# Allegro board arena_12-12_v2C.brd
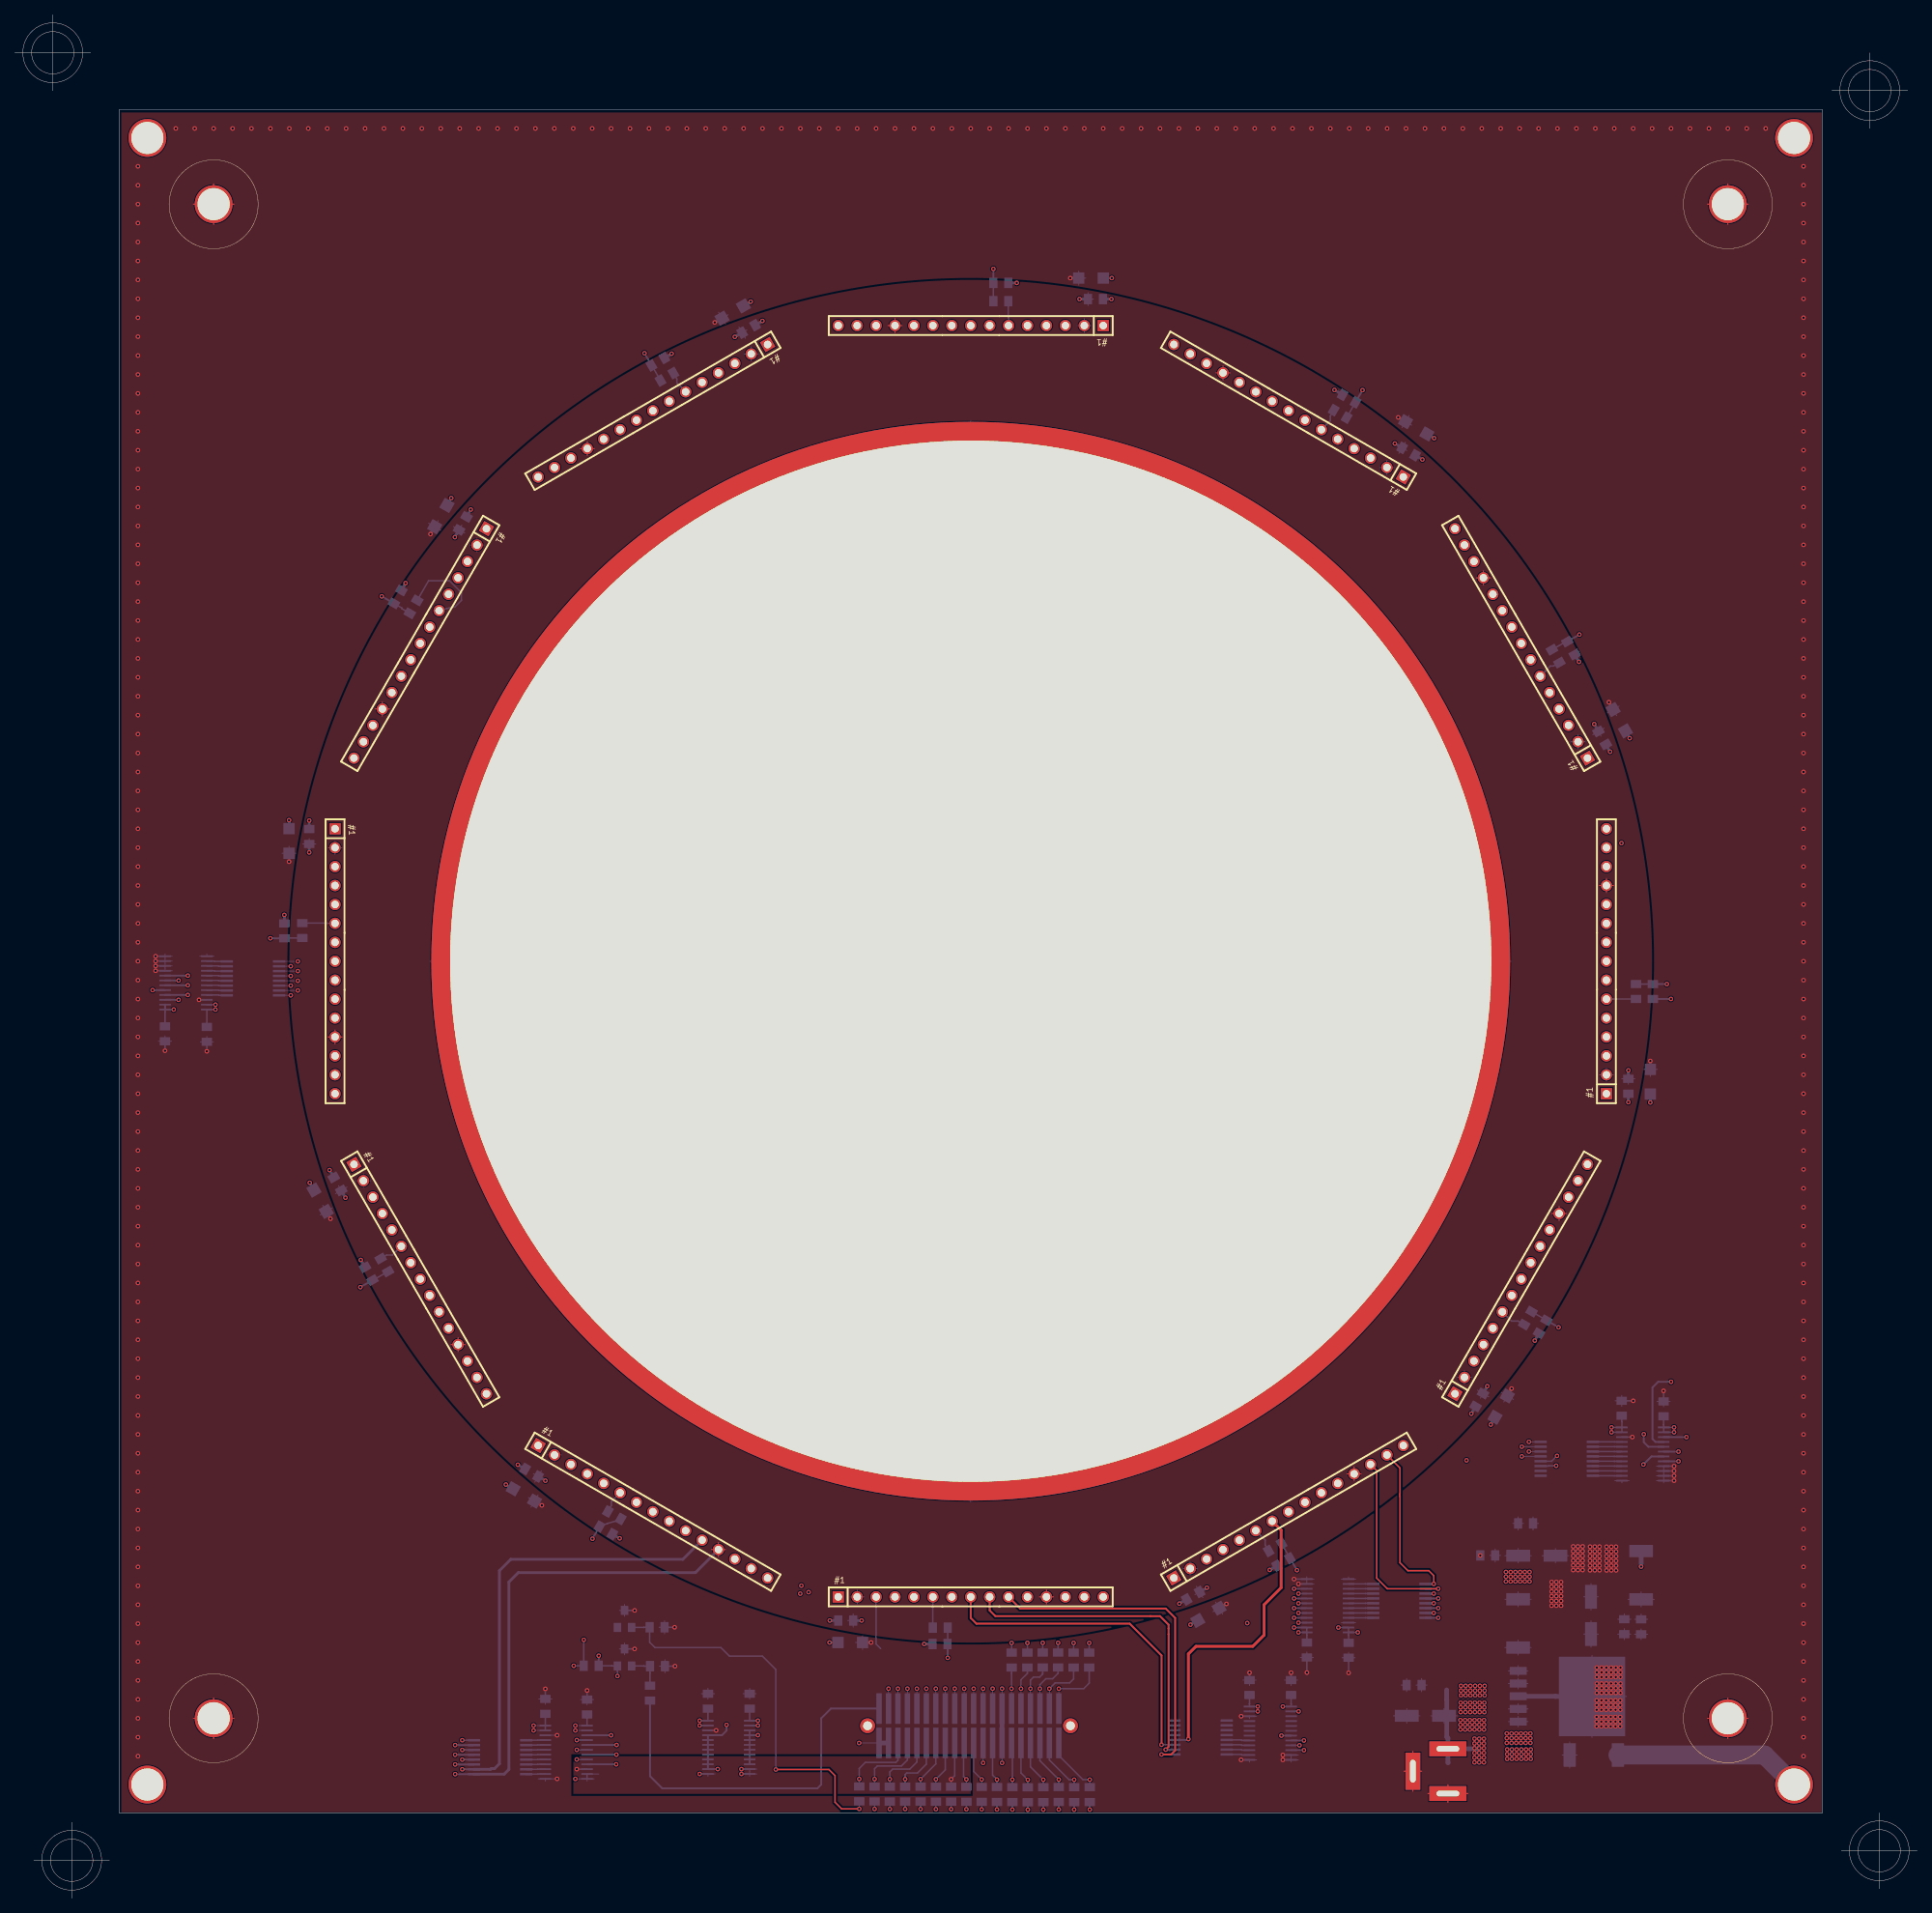
[diagram p0: board, top side]
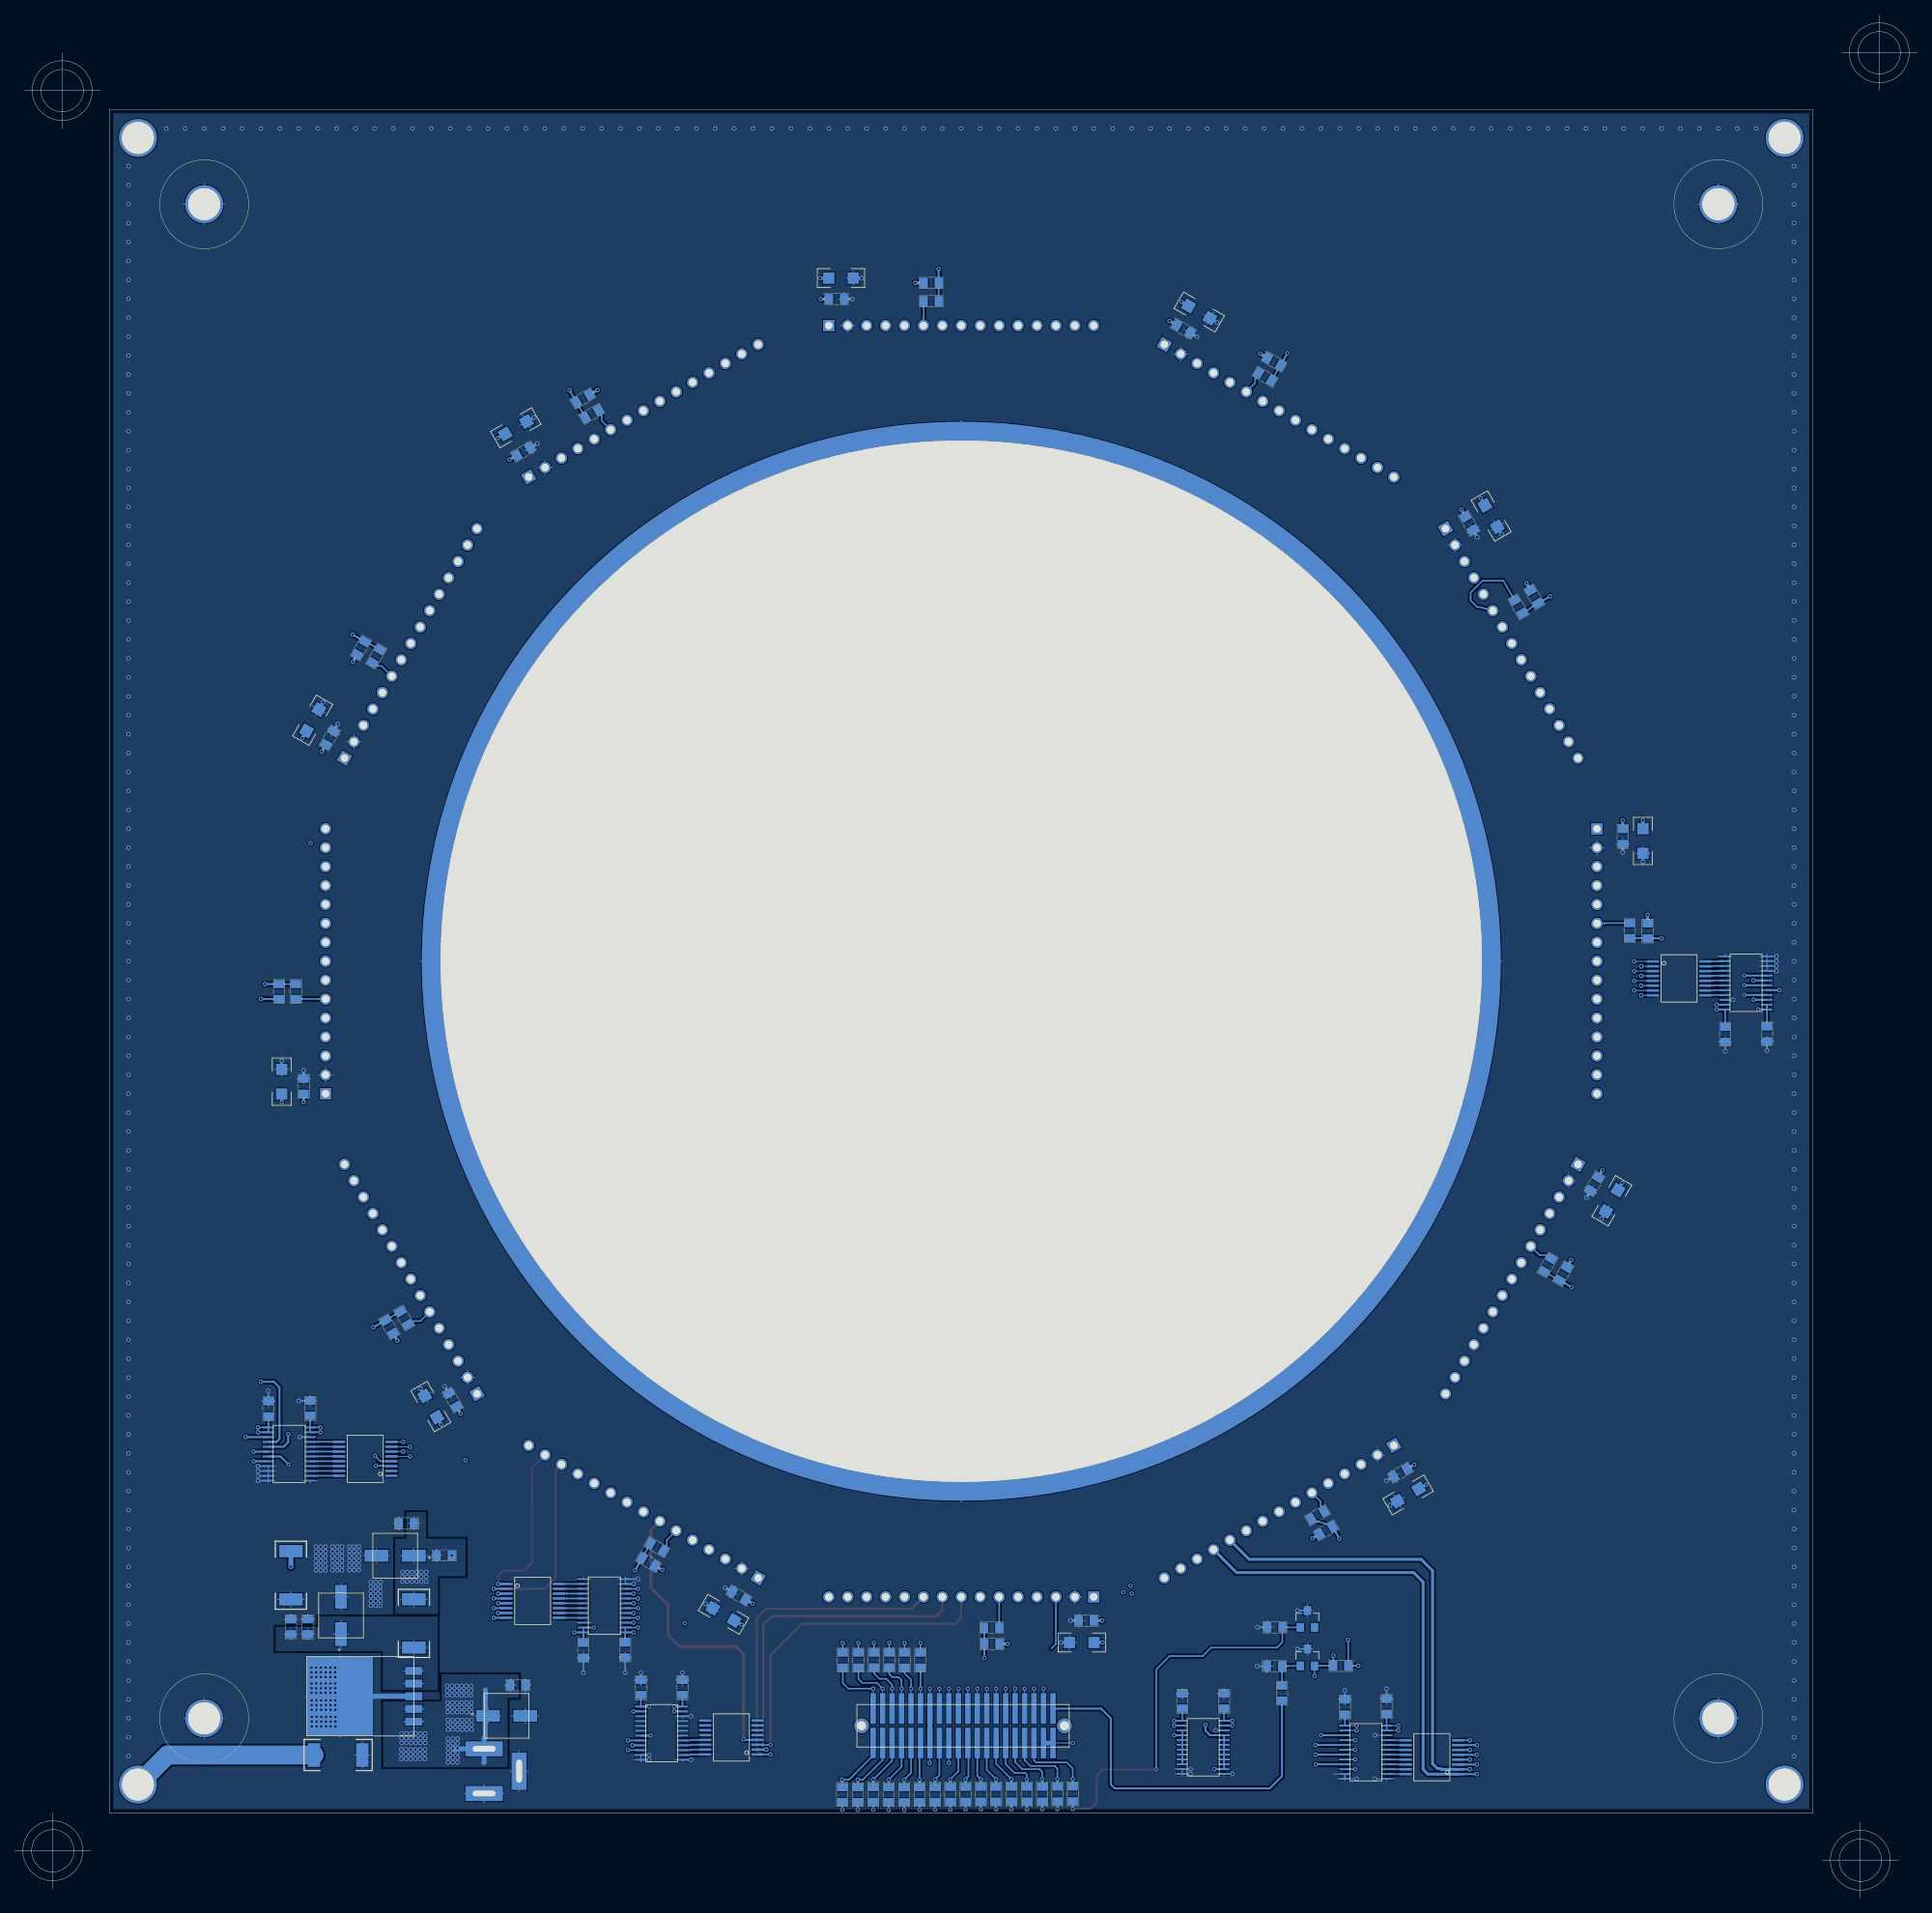
[diagram p1: board, bottom side, seen from below]

Outline 255.27 x 252.73 mm; copper layers: TOP, PWR, GND0, CLK, GND1, MOSI, GND2, SIG, GND3, MISO, GND4, BOTTOM. Coordinates in mm from the lower left corner of the outline.
Outline path: circle c5.08,247.65 r2.84 ; circle c5.08,247.65 r4.02 ; circle c7.62,5.08 r2.84 ; circle c7.62,5.08 r4.02 ; circle c26.67,227.31 r5.97 ; circle c26.67,24.13 r5.97 ; circle c128.27,125.73 r69.85 ; circle c229.87,227.31 r5.97 ; circle c229.87,24.13 r5.97 ; circle c248.92,242.57 r2.84 ; circle c248.92,242.57 r4.02 ; circle c250.19,6.35 r2.84 ; circle c250.19,6.35 r4.02 ; 0,247.65 10.16,247.65 ; 2.54,5.08 12.7,5.08 ; 5.08,252.73 5.08,242.57 ; 7.62,10.16 7.62,0 ; 125.98,125.73 130.56,125.73 ; 128.27,123.44 128.27,128.02 ; 243.84,242.57 254,242.57 ; 245.11,6.35 255.27,6.35 ; 248.92,247.65 248.92,237.49 ; 250.19,11.43 250.19,1.27 ; 13.97,240.03 13.97,11.43 242.57,11.43 242.57,240.03 13.97,240.03

## Design rules (mm)
net group MISO: nets MISO_0 MISO_1 MISO_2 MISO_3 MISO_4 MISO_5 MISO_6 MISO_7 MISO_8 MISO_9 MISO_10 MISO_11
net group MOSI: nets MOSI_0 MOSI_1 MOSI_2 MOSI_3 MOSI_4 MOSI_5 MOSI_6 MOSI_7 MOSI_8 MOSI_9 MOSI_10 MOSI_11
net group MOSI_IN: nets MOSI_IN_0 MOSI_IN_1 MOSI_IN_2 MOSI_IN_3 MOSI_IN_4 MOSI_IN_5 MOSI_IN_6 MOSI_IN_7 MOSI_IN_8 MOSI_IN_9 MOSI_IN_10 MOSI_IN_11

## Placement (name value [footprint] x y rotation side)
C1  10uF  [1206]  96.33 212.85 210 bottom
C2  10uF  [1206]  144.41 217.41 180 bottom
C3  0.1uF  [EIA0805]  187.03 194.13 150 bottom
C4  10uF  [1206]  188.05 197.32 150 bottom
C5  0.1uF  [EIA0805]  145.01 214.59 180 bottom
C6  0.1uF  [EIA0805]  98.46 210.59 210 bottom
C7  0.1uF  [0805]  60.11 184.49 240 bottom
C8  10uF  [1206]  57.16 185.47 240 bottom
C9  10uF  [1206]  219.47 109.56 90 bottom
C10  0.1uF  [EIA0805]  216.52 108.95 90 bottom
C11  10uF  [1206]  36.79 141.87 270 bottom
C12  0.1uF  [EIA0805]  39.5 142.47 270 bottom
C13  10uF  [1206]  199.45 65.96 60 bottom
C14  0.1uF  [EIA0805]  196.52 66.85 60 bottom
C15  10uF  [1206]  68.3 54.1 330 bottom
C16  0.1uF  [EIA0805]  69.34 57.09 330 bottom
C17  10uF  [1206]  160.17 38.09 30 bottom
C18  0.1uF  [EIA0805]  158.12 40.59 30 bottom
C19  0.1uF  [EIA0805]  111.49 37.25 0 bottom
C20  10uF  [1206]  112.1 34.3 0 bottom
C21  10uF  [1206]  40.96 93.59 300 bottom
C22  0.1uF  [EIA0805]  43.29 95.85 300 bottom
C23  10uF  [1206]  215.3 158.08 120 bottom
C24  0.1uF  [EIA0805]  213 155.7 120 bottom
C25  0.1uF  [EIA0805]  76.78 25.64 90 bottom
C26  0.1uF  [EIA0805]  165.68 28.26 90 bottom
C27  0.1uF  [EIA0805]  171.26 28.26 90 bottom
C28  0.1uF  [EIA0805]  71.18 25.73 90 bottom
C29  0.1uF  [EIA0805]  25.76 115.91 270 bottom
C30  0.1uF  [EIA0805]  20.14 115.99 270 bottom
C31  0.1uF  [EIA0805]  173.38 33.3 270 bottom
C32  0.1uF  [EIA0805]  178.98 33.26 270 bottom
C33  0.1uF  [EIA0805]  98.6 26.43 90 bottom
C34  0.1uF  [EIA0805]  93 26.43 90 bottom
C35  0.1uF  [EIA0805]  215.63 65.74 90 bottom
C36  0.1uF  [EIA0805]  221.25 65.66 90 bottom
C37  0.1uF  [EIA0805]  187.77 28.59 180 bottom
C38  10uF  [AL_CAP_D]  191.78 24.46 180 bottom
C39  10uF/6.3/Elec  [AL_CAP_D]  211.51 35.43 90 bottom
C40  0.001uF/X5R  [EIA0805]  218.24 36.41 90 bottom
C41  0.1uF/X5R  [EIA0805]  215.98 36.42 90 bottom
C42  2.2uF/60/Elec  [AL_CAP_D]  201.74 45.95 0 bottom
C43  0.01uF/X5R  [EIA0805]  197.65 45.99 180 bottom
C44  0.1uF/X5R  [EIA0805]  202.73 50.28 0 bottom
J1  CONN15  [HDR-1X15]  70.22 60.74 330 top
J2  CONN15  [HDR-1X15]  193.26 67.68 60 top
J3  CONN15  [HDR-1X15]  211.04 152.99 120 top
J4  CONN15  [HDR-1X15]  110.49 40.42 0 top
J5  CONN15  [HDR-1X15]  42.96 143.51 270 top
J6  CONN15  [HDR-1X15]  101.01 208.5 210 top
J7  CONN15  [HDR-1X15]  186.32 190.72 150 top
J8  CONN15  [HDR-1X15]  155.53 42.96 30 top
J9  CONN15  [HDR-1X15]  213.58 107.95 90 top
J10  CONN15  [HDR-1X15]  45.5 98.47 300 top
J17  CONN15  [HDR-1X15]  63.28 183.78 240 top
J19  CONN15  [HDR-1X15]  146.05 211.04 180 top
J25  A35051-ND (68pin, 1.27mm pitch, Through hold, A113405-ND)  [SMV_2X20]  115.96 25.44 270 bottom
J26  CP-102A-ND  [PJ102A]  192.3 17.03 0 bottom
L1  Ferrite Bead/5-15Ohm  [EIA2512]  211.89 19.2 0 bottom
L2  Ferrite Bead/5-15Ohm  [EIA2512]  218.24 43.33 270 bottom
L3  Ferrite Bead/5-15Ohm  [EIA2512]  201.73 36.87 90 bottom
M1  TEST POINT  [8-32]  238.76 15.24 0 top
M2  TEST POINT  [8-32]  17.78 15.24 0 top
M3  TEST POINT  [8-32]  229.87 24.13 0 top
M4  TEST POINT  [8-32]  26.67 24.13 0 top
M5  TEST POINT  [8-32]  229.87 227.33 0 top
M6  TEST POINT  [8-32]  26.67 227.33 0 top
M7  TEST POINT  [8-32]  17.78 236.22 0 top
M8  TEST POINT  [8-32]  238.76 236.22 0 top
M9  TEST POINT  [1-32]  128.27 125.73 0 top
NOREF  -  []  13.97 240.03 0 top
NOREF#2  -  []  149.56 192.26 0 top
NOREF#3  -  []  242.57 11.43 90 top
Q1  MTD4P06  [SOT-23]  81.81 37.47 180 bottom
Q3  MTD4P06  [SOT-23]  81.81 32.3 180 bottom
R1  27  [EIA0805]  124.18 36.3 180 bottom
R2  27  [EIA0805]  80.44 51.38 150 bottom
R3  27  [EIA0805]  49.58 84.96 120 bottom
R4  27  [EIA0805]  38.57 129.84 90 bottom
R5  27  [EIA0805]  53.49 173.29 60 bottom
R6  27  [EIA0805]  87.5 204.17 30 bottom
R7  27  [EIA0805]  132.31 214.31 0 bottom
R8  27  [EIA0805]  177.85 199.19 150 bottom
R9  27  [EIA0805]  206.77 166.67 300 bottom
R10  27  [EIA0805]  217.55 121.67 270 bottom
R11  27  [EIA0805]  203.03 77.84 240 bottom
R12  27  [EIA0805]  169.11 47.09 210 bottom
R13  200  [EIA0805]  113.31 13.98 270 bottom
R14  20K  [EIA0805]  86.18 36.35 180 bottom
R17  200  [EIA0805]  85.23 27.51 90 bottom
R18  20K  [EIA0805]  86.23 31.13 180 bottom
R19  4.7K  [EIA0805]  131.79 13.91 270 bottom
R20  4.7K  [EIA0805]  77.34 31.18 0 bottom
R21  4.7K  [EIA0805]  125.64 13.94 270 bottom
R22  4.7K  [EIA0805]  123.6 13.94 270 bottom
R23  4.7K  [EIA0805]  133.76 31.94 90 bottom
R24  4.7K  [EIA0805]  135.88 31.94 90 bottom
R25  4.7K  [EIA0805]  140.08 13.91 270 bottom
R26  4.7K  [EIA0805]  138.01 13.88 270 bottom
R27  4.7K  [EIA0805]  135.93 13.87 270 bottom
R28  4.7K  [EIA0805]  133.86 13.89 270 bottom
R29  4.7K  [EIA0805]  129.74 13.92 270 bottom
R30  4.7K  [EIA0805]  127.69 13.93 270 bottom
R31  4.7K  [EIA0805]  144.25 13.89 270 bottom
R32  4.7K  [EIA0805]  142.15 13.88 270 bottom
R33  4.7K  [EIA0805]  137.93 31.95 90 bottom
R34  4.7K  [EIA0805]  139.99 31.95 90 bottom
R35  4.7K  [EIA0805]  142.07 31.94 90 bottom
R36  4.7K  [EIA0805]  144.17 31.94 90 bottom
R37  4.7K  [EIA0805]  179.04 201.24 150 bottom
R38  4.7K  [EIA0805]  132.31 216.76 0 bottom
R39  4.7K  [EIA0805]  86.28 206.2 30 bottom
R40  4.7K  [EIA0805]  51.36 174.62 60 bottom
R41  4.7K  [EIA0805]  36.16 129.81 90 bottom
R42  4.7K  [EIA0805]  47.49 83.79 120 bottom
R43  4.7K  [EIA0805]  79.31 49.35 330 bottom
R44  4.7K  [EIA0805]  124.16 34.1 180 bottom
R49  4.7K  [EIA0805]  170.24 45.11 210 bottom
R50  4.7K  [EIA0805]  205.03 76.67 240 bottom
R51  4.7K  [EIA0805]  219.81 121.67 270 bottom
R52  4.7K  [EIA0805]  208.83 167.77 300 bottom
R57  4.7K  [EIA0805]  121.54 13.96 270 bottom
R58  4.7K  [EIA0805]  119.47 13.96 270 bottom
R59  4.7K  [EIA0805]  117.41 13.96 270 bottom
R60  4.7K  [EIA0805]  115.37 13.97 270 bottom
RN1  20  [SSOP16]  65.11 18.91 0 bottom
RN3  20  [SSOP16]  31.94 123.43 180 bottom
RN4  20  [SSOP16]  185.79 39.89 180 bottom
RN5  20  [SSOP16]  159.12 21.55 0 bottom
RN6  20  [SSOP16]  208.25 58.95 0 bottom
U1  SN74LVC8T245  [TSSOP24]  76.78 23.15 180 bottom
U2  SN74LVC8T245  [TSSOP24]  20.15 119.25 0 bottom
U3  SN74LVC8T245  [TSSOP24]  98.6 23.81 180 bottom
U4  SN74LVC8T245  [TSSOP24]  173.37 35.66 0 bottom
U5  SN74LVC8T245  [TSSOP24]  171.27 25.7 180 bottom
U6  SN74LVC8T245  [TSSOP24]  221.26 63.17 180 bottom
U7  LT1764  [DD5]  201.74 23.69 0 bottom

## Library data of the parts
C1 C2 C4 C8 C9 C11 C13 C15 C17 C20 C21 C23 C38 = CAPACITOR POL
C3 C5-C7 C10 C12 C14 C16 C18 C19 C22 C24-C37 = CAPACITOR NON-POL
C39 C42 = CAPACITOR
C40 C41 C43 C44 = CAP NP
J1-J10 J17 J19 = CONN RECT 15_7
J25 = HEADER 34x2_1
J26 = HEADER 3
L1-L3 = BEADARR_4
M1-M9 = TEST POINT
Q1 Q3 = MTD4P06
R1-R14 R17-R44 R49-R52 R57-R60 = RESISTOR
RN1 RN3-RN6 = RESNW_IS_8
U1-U6 = SN7474LVC8T245
U7 = LT1764

## Footprints (pads in the part's own frame, mm; a bottom-side part is the same pattern mirrored in y, then rotated)
1-32
  round 144.78 hole 139.7 unplated: (0,0)
8-32
  round 5.08 hole 4.305: 1(0,0)
0805
  rect 1.1x1.4 smd: 1(-1.001,0) 2(1.001,0)
1206
  rect 1.524x1.524 smd: 1(-1.651,0) 2(1.651,0)
AL_CAP_D
  rect 3.2x1.6 smd: 1(0,0) 2(5.001,0)
DD5
  rect 2.286x1.067 smd: 1(0,0) 2(0,-1.702) 3(0,-3.404) 4(0,-5.105) 5(0,-6.807)
  rect 8.89x10.668 smd: 6(9.906,-3.378)
EIA0805
  rect 1.1x1.4 smd: 1(-1.001,0) 2(1.001,0)
EIA2512
  rect 1.651x3.175 smd: 1(-3.239,0) 2(3.239,0)
HDR-1X15
  rect 1.524x1.524 hole 1.016: 1(0,0)
  round 1.524 hole 1.016: 2(2.54,0) 3(5.08,0) 4(7.62,0) 5(10.16,0) 6(12.7,0) 7(15.24,0) 8(17.78,0) 9(20.32,0) 10(22.86,0) 11(25.4,0) 12(27.94,0) 13(30.48,0) 14(33.02,0) 15(35.56,0)
PJ102A
  rect 5.001x1.999 hole 3.051x0.759: 1(0,-3) 2(0,3)
  rect 1.999x5.001 hole 0.759x3.051: 3(-4.699,0)
SMV_2X20
  round 1.999 hole 1.191 unplated: (2.309,-25.69) (2.309,1.539)
  rect 4.11x0.729 smd: 1(0,0) 2(0,-1.27) 3(0,-2.54) 4(0,-3.81) 5(0,-5.08) 6(0,-6.35) 7(0,-7.62) 8(0,-8.89) 9(0,-10.16) 10(0,-11.43) 11(0,-12.7) 12(0,-13.97) 13(0,-15.24) 14(0,-16.51) 15(0,-17.78) 16(0,-19.05) 17(0,-20.32) 18(0,-21.59) 19(0,-22.86) 20(0,-24.13) 21(4.62,-24.13) 22(4.62,-22.86) 23(4.62,-21.59) 24(4.62,-20.32) 25(4.62,-19.05) 26(4.62,-17.78) 27(4.62,-16.51) 28(4.62,-15.24) 29(4.62,-13.97) 30(4.62,-12.7) 31(4.62,-11.43) 32(4.62,-10.16) 33(4.62,-8.89) 34(4.62,-7.62) 35(4.62,-6.35) 36(4.62,-5.08) 37(4.62,-3.81) 38(4.62,-2.54) 39(4.62,-1.27) 40(4.62,0)
SOT-23
  rect 1.016x1.219 smd: 1(-0.953,-1.143) 2(0.953,-1.143) 3(0,1.143)
SSOP16
  rect 1.651x0.33 smd: 1(-3.505,2.276) 2(-3.505,1.626) 3(-3.505,0.975) 4(-3.505,0.325) 5(-3.505,-0.325) 6(-3.505,-0.975) 7(-3.505,-1.626) 8(-3.505,-2.276) 9(3.505,-2.276) 10(3.505,-1.626) 11(3.505,-0.975) 12(3.505,-0.325) 13(3.505,0.325) 14(3.505,0.975) 15(3.505,1.626) 16(3.505,2.276)
TSSOP24
  rect 1.549x0.249 smd: 1(0,0) 2(0,-0.65) 3(0,-1.3) 4(0,-1.951) 5(0,-2.601) 6(0,-3.251) 7(0,-3.899) 8(0,-4.549) 9(0,-5.199) 10(0,-5.85) 11(0,-6.5) 12(0,-7.15) 13(5.601,-7.15) 14(5.601,-6.5) 15(5.601,-5.85) 16(5.601,-5.199) 17(5.601,-4.549) 18(5.601,-3.899) 19(5.601,-3.251) 20(5.601,-2.601) 21(5.601,-1.951) 22(5.601,-1.3) 23(5.601,-0.65) 24(5.601,0)

## Nets
3.3VDC: C25.1 C27.1 C29.1 C31.1 C33.1 C35.1 C42.1 C43.1 C44.1 L3.2 R19.2 R21.2 R22.2 R23.2 R24.2 R25.2 R26.2 R27.2 R28.2 R29.2 R30.2 R31.2 R32.2 R33.2 R34.2 R35.2 R36.2 R57.2 R58.2 R59.2 R60.2 U1.1(VCCA) U1.2(DIR) U2.23(VCCB2) U2.24(VCCB1) U3.1(VCCA) U3.2(DIR) U4.1(VCCA) U4.2(DIR) U5.1(VCCA) U5.2(DIR) U6.23(VCCB2) U6.24(VCCB1)
5VDC: C1.1 C2.1 C3.1 C4.1 C5.1 C6.1 C7.1 C8.1 C9.1 C10.1 C11.1 C12.1 C13.1 C14.1 C15.1 C16.1 C17.1 C18.1 C19.1 C20.1 C21.1 C22.1 C23.1 C24.1 C26.1 C28.1 C30.1 C32.1 C34.1 C36.1 C37.1 C38.1 J1.1 J2.1 J3.1 J4.1 J5.1 J6.1 J7.1 J8.1 J9.1 J10.1 J17.1 J19.1 J26.1 R20.1 R37.2 R38.2 R39.2 R40.2 R41.2 R42.2 R43.2 R44.2 R49.2 R50.2 R51.2 R52.2 U1.23(VCCB2) U1.24(VCCB1) U2.1(VCCA) U2.2(DIR) U3.23(VCCB2) U3.24(VCCB1) U4.23(VCCB2) U4.24(VCCB1) U5.23(VCCB2) U5.24(VCCB1) U6.1(VCCA) U6.2(DIR) U7.1(IN) U7.2(EN)
GND: C1.2 C2.2 C3.2 C4.2 C5.2 C6.2 C7.2 C8.2 C9.2 C10.2 C11.2 C12.2 C13.2 C14.2 C15.2 C16.2 C17.2 C18.2 C19.2 C20.2 C21.2 C22.2 C23.2 C24.2 C25.2 C26.2 C27.2 C28.2 C29.2 C30.2 C31.2 C32.2 C33.2 C34.2 C35.2 C36.2 C37.2 C38.2 C39.2 C40.2 C41.2 C42.2 C43.2 C44.2 J1.2 J2.2 J3.2 J4.2 J5.2 J6.2 J7.2 J8.2 J9.2 J10.2 J17.2 J19.2 J26.2 J26.3 L1.1 L2.2 M3.1 M4.1 M5.1 M6.1 Q1.3(S) Q3.3(S) R14.1 R18.1 U1.11(GND1) U1.12(GND2) U1.13(GND3) U1.22(\\O\E\) U2.9(A7) U2.10(A8) U2.11(GND1) U2.12(GND2) U2.13(GND3) U2.22(\\O\E\) U3.11(GND1) U3.12(GND2) U3.13(GND3) U3.22(\\O\E\) U4.11(GND1) U4.12(GND2) U4.13(GND3) U4.22(\\O\E\) U5.11(GND1) U5.12(GND2) U5.13(GND3) U5.22(\\O\E\) U6.9(A7) U6.10(A8) U6.11(GND1) U6.12(GND2) U6.13(GND3) U6.22(\\O\E\) U7.3(GND) U7.6(PAD)
GND_SIGNAL: J25.14 J25.27 J25.29 J25.39 J25.40 L2.1
CS0: J1.7 J2.7 J3.7 J4.7 J5.7 J6.7 J7.7 J8.7 J9.7 J10.7 J17.7 J19.7 RN5.4
CS1: J1.8 J2.8 J3.8 J4.8 J5.8 J6.8 J7.8 J8.8 J9.8 J10.8 J17.8 J19.8 RN5.3
CS2: J1.9 J2.9 J3.9 J4.9 J5.9 J6.9 J7.9 J8.9 J9.9 J10.9 J17.9 J19.9 RN5.2
CS3: J1.10 J2.10 J3.10 J4.10 J5.10 J6.10 J7.10 J8.10 J9.10 J10.10 J17.10 J19.10 RN5.1
CS4: J1.11 J2.11 J3.11 J4.11 J5.11 J6.11 J7.11 J8.11 J9.11 J10.11 J17.11 J19.11 RN1.2
CS5: J1.12 J2.12 J3.12 J4.12 J5.12 J6.12 J7.12 J8.12 J9.12 J10.12 J17.12 J19.12 RN1.1
CS6: J1.13 J2.13 J3.13 J4.13 J5.13 J6.13 J7.13 J8.13 J9.13 J10.13 J17.13 J19.13 RN4.2
CS7: J1.14 J2.14 J3.14 J4.14 J5.14 J6.14 J7.14 J8.14 J9.14 J10.14 J17.14 J19.14 RN4.1
CS_IN_0: J25.37 R60.1 U5.7(A5)
CS_IN_1: J25.36 R59.1 U5.8(A6)
CS_IN_2: J25.35 R58.1 U5.9(A7)
CS_IN_3: J25.34 R57.1 U5.10(A8)
CS_IN_4: J25.33 R22.1 U1.9(A7)
CS_IN_5: J25.32 R21.1 U1.10(A8)
CS_IN_6: J25.31 R30.1 U4.9(A7)
CS_IN_7: J25.30 R29.1 U4.10(A8)
EXT_INT: J1.15 J2.15 J3.15 J4.15 J5.15 J6.15 J7.15 J8.15 J9.15 J10.15 J17.15 J19.15 Q3.2(D) R20.2
EXT_INT_IN: J25.1 R17.1
MISO_0: R1.1 R44.1 U6.7(A5)
MISO_1: R2.1 R43.1 U2.3(A1)
MISO_2: R3.1 R42.1 U2.4(A2)
MISO_3: R4.1 R41.1 U2.5(A3)
MISO_4: R5.1 R40.1 U2.6(A4)
MISO_5: R6.1 R39.1 U2.7(A5)
MISO_6: R7.1 R38.1 U2.8(A6)
MISO_7: R8.1 R37.1 U6.8(A6)
MISO_8: R9.1 R52.1 U6.3(A1)
MISO_9: R10.1 R51.1 U6.4(A2)
MISO_10: R11.1 R50.1 U6.5(A3)
MISO_11: R12.1 R49.1 U6.6(A4)
MISO_OUT_0: J25.13 RN6.4
MISO_OUT_1: J25.12 RN3.8
MISO_OUT_2: J25.11 RN3.7
MISO_OUT_3: J25.10 RN3.6
MISO_OUT_4: J25.9 RN3.5
MISO_OUT_5: J25.8 RN3.4
MISO_OUT_6: J25.7 RN3.3
MISO_OUT_7: J25.6 RN6.3
MISO_OUT_8: J25.5 RN6.8
MISO_OUT_9: J25.4 RN6.7
MISO_OUT_10: J25.3 RN6.6
MISO_OUT_11: J25.2 RN6.5
MOSI_0: J4.5 RN1.8
MOSI_1: J1.5 RN1.7
MOSI_2: J10.5 RN1.6
MOSI_3: J5.5 RN1.5
MOSI_4: J17.5 RN1.4
MOSI_5: J6.5 RN1.3
MOSI_6: J19.5 RN4.8
MOSI_7: J7.5 RN4.7
MOSI_8: J3.5 RN4.6
MOSI_9: J9.5 RN4.5
MOSI_10: J2.5 RN4.4
MOSI_11: J8.5 RN4.3
MOSI_IN_0: J25.26 R28.1 U1.8(A6)
MOSI_IN_1: J25.25 R27.1 U1.7(A5)
MOSI_IN_2: J25.24 R26.1 U1.6(A4)
MOSI_IN_3: J25.23 R25.1 U1.5(A3)
MOSI_IN_4: J25.22 R32.1 U1.4(A2)
MOSI_IN_5: J25.21 R31.1 U1.3(A1)
MOSI_IN_6: J25.20 R36.1 U4.3(A1)
MOSI_IN_7: J25.19 R35.1 U4.4(A2)
MOSI_IN_8: J25.18 R34.1 U4.5(A3)
MOSI_IN_9: J25.17 R33.1 U4.6(A4)
MOSI_IN_10: J25.16 R24.1 U4.7(A5)
MOSI_IN_11: J25.15 R23.1 U4.8(A6)
RESET_IN: J25.38 R13.1
SCK: J1.4 J2.4 J3.4 J4.4 J5.4 J6.4 J7.4 J8.4 J9.4 J10.4 J17.4 J19.4 U3.14(B8) U3.15(B7) U3.16(B6) U3.17(B5) U3.18(B4) U3.19(B3) U3.20(B2) U3.21(B1)
SCK_IN_0: J25.28 R19.1 U3.3(A1) U3.4(A2) U3.5(A3) U3.6(A4) U3.7(A5) U3.8(A6) U3.9(A7) U3.10(A8)
N00182: J4.6 R1.2
N04213: J1.6 R2.2
N04860: J10.6 R3.2
N05048: J5.6 R4.2
N06135: J17.6 R5.2
N06323: J6.6 R6.2
N06511: J19.6 R7.2
N06699: J7.6 R8.2
N07866: J3.6 R9.2
N08054: J9.6 R10.2
N08430: J8.6 R12.2
N65117: J2.6 R11.2
N65750: Q1.1(G) R13.2 R14.2
N124786: C39.1 C40.1 C41.1 L3.1 U7.4(OUT) U7.5(SENSE)
N207682: Q3.1(G) R17.2 R18.2
N248336: L1.2 M1.1 M2.1 M7.1 M8.1
N271524: RN5.14 U5.16(B6)
N271526: RN5.15 U5.15(B7)
N271528: RN5.16 U5.14(B8)
N279010: RN5.13 U5.17(B5)
N926808: RN3.9 U2.21(B1)
N926809: RN3.10 U2.20(B2)
N953908: RN1.9 U1.21(B1)
N953909: RN1.10 U1.20(B2)
N9268010: RN3.11 U2.19(B3)
N9268011: RN3.12 U2.18(B4)
N9268012: RN3.13 U2.17(B5)
N9268013: RN3.14 U2.16(B6)
N9268014: RN3.15 U2.15(B7)
N9268015: RN3.16 U2.14(B8)
N9539010: RN1.11 U1.19(B3)
N9539011: RN1.12 U1.18(B4)
N9539012: RN1.13 U1.17(B5)
N9539013: RN1.14 U1.16(B6)
N9539014: RN1.15 U1.15(B7)
N9539015: RN1.16 U1.14(B8)
N10228215: RN4.9 U4.21(B1)
N10228216: RN4.10 U4.20(B2)
N10228217: RN4.11 U4.19(B3)
N10228218: RN4.12 U4.18(B4)
N10228219: RN4.13 U4.17(B5)
N10228220: RN4.14 U4.16(B6)
N10228221: RN4.15 U4.15(B7)
N10228222: RN4.16 U4.14(B8)
N11250315: RN6.9 U6.21(B1)
N11250316: RN6.10 U6.20(B2)
N11250317: RN6.11 U6.19(B3)
N11250318: RN6.12 U6.18(B4)
N11250319: RN6.13 U6.17(B5)
N11250320: RN6.14 U6.16(B6)
N11250321: RN6.15 U6.15(B7)
N11250322: RN6.16 U6.14(B8)

Pads without a net: J1 3; J2 3; J3 3; J4 3; J5 3; J6 3; J7 3; J8 3; J9 3; J10 3; J17 3; J19 3; Q1 2; RN3 1 2; RN5 5 6 7 8 9 10 11 12; RN6 1 2; U5 3 4 5 6 18 19 20 21

## Via types
v1: diameter 0.61, hole 0.33, TOP to BOTTOM, 799 vias

## Routing (per net, layer and track width the routed paths; a pad name or vN(x,y) marks a point on that pad's centre or on a via; arc(x,y) is an arc through that point)
3.3VDC: length 67.1
  BOTTOM w0.127: 199.96,40.11 L3.2 ; L3.2 201.73,39.1 ; L3.2 203.49,40.11 ; L3.2 201.73,41.11 ; 201,50.28 C44.1 ; C44.1 202.46,50.28 ; C44.1 201.73,49.4 ; C44.1 201.73,51.16 ; 201.74,44.97 C42.1 ; C42.1 201.74,46.93 ; C42.1 203.52,45.95 ; C42.1 199.96,45.95 ; U1.1 v1(75.21,23.15) ; C43.1 199.38,45.99 ; C43.1 198.65,45.11 ; C43.1 198.65,46.87 ; C43.1 197.92,45.99 ; U1.2 v1(75.21,22.5)
  BOTTOM w0.203: U6.24 v1(214.26,63.17) ; U6.24 U6.23 v1(214.26,62.52) ; U6.24 215.66,63.93 215.63,63.95 C35.1 ; U4.1 U4.2 v1(171.66,36.31) ; U4.1 v1(172.25,35.66) ; U4.1 173.37,35.31 173.38,35.3 C31.1 ; R23.2 v1(133.76,34.24) ; R29.2 v1(129.74,11.91) ; C27.1 171.26,26.07 171.27,26.06 U5.1 v1(170.15,25.7) ; C33.1 U3.1 v1(99.71,23.81) ; R21.2 v1(125.64,11.94) ; v1(26.91,119.25) U2.24 C29.1 ; U3.2 v1(99.71,23.16) ; R31.2 v1(144.25,11.89) ; R25.2 v1(140.08,11.9) ; U2.23 v1(26.91,119.9) ; R60.2 v1(115.37,11.96) ; R26.2 v1(138.01,11.87) ; U1.1 C25.1 ; U5.2 v1(172.27,25.05) ; R57.2 v1(121.54,11.95) ; R19.2 v1(131.79,11.9) ; R36.2 v1(144.17,34.24) ; R24.2 v1(135.88,34.24) ; R33.2 v1(137.93,34.25) ; R28.2 v1(133.86,11.89) ; R58.2 v1(119.47,11.95) ; R34.2 v1(139.99,34.25) ; R59.2 v1(117.41,11.95) ; R27.2 v1(135.93,11.86) ; R35.2 v1(142.07,34.24) ; R32.2 v1(142.15,11.87) ; R22.2 v1(123.6,11.94) ; R30.2 v1(127.69,11.93)
  vias: v1(200.09,43.76) v1(200.09,43.13) v1(200.09,42.49) v1(200.72,43.76) v1(200.72,43.13) v1(200.72,42.49) v1(201.36,43.76) v1(201.36,43.13) v1(201.36,42.49) v1(201.99,43.76) v1(201.99,43.13) v1(201.99,42.49) v1(202.63,43.76) v1(202.63,43.13) v1(202.63,42.49) v1(203.26,43.76) v1(203.26,43.13) v1(203.26,42.49)
5VDC: length 157.7
  PWR w0.127: 210.1,152.99 J3.1 ; J3.1 211.98,152.99 ; J3.1 211.04,153.93 ; J3.1 211.04,152.04 ; J10.1 46.44,98.47 ; J10.1 44.56,98.47 ; J10.1 45.5,99.42 ; J10.1 45.5,97.53 ; J1.1 70.22,61.68 ; J1.1 71.16,60.74 ; J1.1 69.28,60.74 ; J1.1 70.22,59.8 ; 110.49,39.48 J4.1 ; J4.1 109.55,40.42 ; J4.1 111.43,40.42 ; J4.1 110.49,41.36 ; 186.32,189.78 J7.1 ; J7.1 186.32,191.66 ; J7.1 187.26,190.72 ; J7.1 185.38,190.72 ; 189.62,20.03 J26.1 ; J26.1 194.99,20.03 ; J26.1 192.3,18.85 ; J26.1 192.3,21.21 ; J2.1 194.2,67.68 ; J2.1 193.26,68.62 ; J2.1 193.26,66.74 ; J2.1 192.32,67.68 ; J17.1 64.22,183.78 ; J17.1 63.28,182.84 ; J17.1 62.34,183.78 ; J17.1 63.28,184.72 ; J8.1 156.47,42.96 ; J8.1 154.58,42.96 ; J8.1 155.53,42.02 ; J8.1 155.53,43.9 ; J6.1 101.01,209.44 ; J6.1 100.07,208.5 ; J6.1 101.96,208.5 ; J6.1 101.01,207.56 ; 146.05,210.1 J19.1 ; J19.1 146.99,211.04 ; J19.1 145.11,211.04 ; J19.1 146.05,211.98 ; J9.1 214.52,107.95 ; J9.1 213.58,107.01 ; J9.1 212.64,107.95 ; J9.1 213.58,108.89 ; J5.1 43.9,143.51 ; J5.1 42.96,144.45 ; J5.1 42.96,142.57 ; J5.1 42.02,143.51
  BOTTOM w0.127: 191.78,23.48 C38.1 ; C38.1 191.78,25.44 ; C38.1 193.56,24.46 ; C38.1 190,24.46 ; U1.23 v1(69.61,22.5) ; 200.42,25.39 U7.2 ; U7.2 201.74,24.67 ; U7.2 201.74,26.1 ; U7.2 203.06,25.39 ; C37.1 188.77,29.47 ; C37.1 188.04,28.59 ; C37.1 189.5,28.59 ; C37.1 188.77,27.71 ; 201.74,22.97 U7.1 ; U7.1 200.42,23.69 ; U7.1 201.74,24.4 ; U7.1 203.06,23.69 ; U1.24 v1(69.61,23.15)
  BOTTOM w0.203: U1.23 U1.24 C28.1 ; v1(21.31,119.25) U2.1 20.15,118.9 20.14,118.89 C30.1 ; U6.1 v1(222.66,63.17) ; U6.1 221.26,63.52 221.25,63.54 C36.1 ; U6.1 U6.2 v1(222.66,62.52) ; v1(177.61,36.31) U4.23 U4.24 ; C32.1 178.98,35.3 178.97,35.31 U4.24 ; v1(74.99,31.18) R20.1 v1(76.34,34.66) ; U3.23 v1(91.9,23.16) ; U4.24 v1(180.21,35.66) ; 178.06,201.82 178.14,201.74 R37.2 ; U5.23 v1(166.79,25.05) ; C34.1 U3.24 v1(91.9,23.81) ; v1(166.79,25.7) U5.24 165.67,26.06 165.68,26.07 C26.1
  BOTTOM w0.254: R51.2 v1(222.23,120.67) ; U2.1 U2.2
  BOTTOM w0.381: C22.1 v1(42.23,97.7) ; C10.1 v1(216.52,106.82) ; C6.1 v1(100.31,211.66) ; C15.1 v1(65.89,55.5) ; 46.98,84.66 v1(46.42,85.64) ; R44.2 v1(122.02,34.1) ; C14.1 v1(195.45,65) ; C19.1 v1(109.36,37.25) ; 178.06,201.82 v1(177.08,202.39) ; C13.1 v1(198.06,63.55) ; C9.1 v1(219.47,106.78) ; C5.1 v1(147.14,214.59) ; R38.2 v1(134.44,216.76) ; C3.1 v1(188.88,193.06) ; 216.13,156.65 v1(216.7,155.66) ; C12.1 v1(39.5,144.6) ; C4.1 v1(190.46,195.93) ; C18.1 v1(156.27,39.52) ; R40.2 v1(52.43,176.47) ; C2.1 v1(147.2,217.41) ; R43.2 v1(81.16,48.28) ; C1.1 v1(98.74,214.24) ; C16.1 v1(67.49,58.16) ; C7.1 v1(61.18,186.34) ; C21.1 v1(39.57,96) ; R41.2 v1(36.16,131.94) ; R39.2 v1(88.13,207.26) ; R52.2 v1(209.89,165.92) ; C24.1 v1(214.07,153.85) ; C8.1 v1(58.56,187.88) ; C20.1 v1(109.32,34.3) ; C11.1 v1(36.79,144.66) ; 169.38,44.61 v1(168.39,44.04) ; R50.2 v1(203.96,74.82) ; C17.1 v1(157.76,36.7)
  BOTTOM w0.635: J26.1 192.3,18.2 192.34,18.16 ; J26.1 196.36,20.03 196.43,20.1 ; J26.1 192.3,21.48 192.15,21.63 192.15,26.61 192.14,26.62 192.14,27.94
  vias: v1(105.39,40.86) v1(105.54,41.93) v1(106.51,41.06) v1(165.38,36.91) v1(194.02,26.23) v1(194.02,25.59) v1(194.02,24.96) v1(193.98,23.89) v1(193.98,23.25) v1(193.98,22.62) v1(194.06,28.49) v1(194.06,27.85) v1(194.06,27.22) v1(194.61,23.89) v1(194.61,23.25) v1(194.61,22.62) v1(194.69,28.49) v1(194.69,27.85) v1(194.69,27.22) v1(194.65,26.23) v1(194.65,25.59) v1(194.65,24.96) v1(194.81,58.75) v1(195.29,26.23) v1(195.29,25.59) v1(195.29,24.96) v1(195.25,23.89) v1(195.25,23.25) v1(195.25,22.62) v1(195.33,28.49) v1(195.33,27.85) v1(195.33,27.22) v1(195.88,23.89) v1(195.88,23.25) v1(195.88,22.62) v1(195.87,21.39) v1(195.87,20.75) v1(195.87,20.12) v1(195.87,19.48) v1(195.87,18.85) v1(195.87,18.21) v1(195.96,28.49) v1(195.96,27.85) v1(195.96,27.22) v1(195.92,26.23) v1(195.92,25.59) v1(195.92,24.96) v1(196.52,23.89) v1(196.52,23.25) v1(196.52,22.62) v1(196.51,21.39) v1(196.51,20.75) v1(196.51,20.12) v1(196.51,19.48) v1(196.51,18.85) v1(196.51,18.21) v1(196.6,28.49) v1(196.6,27.85) v1(196.6,27.22) v1(196.56,26.23) v1(196.56,25.59) v1(196.56,24.96) v1(197.19,26.23) v1(197.19,25.59) v1(197.19,24.96) v1(197.15,23.89) v1(197.15,23.25) v1(197.15,22.62) v1(197.14,21.39) v1(197.14,20.75) v1(197.14,20.12) v1(197.14,19.48) v1(197.14,18.85) v1(197.14,18.21) v1(197.23,28.49) v1(197.23,27.85) v1(197.23,27.22) v1(200.2,22.1) v1(200.2,21.46) v1(200.2,20.83) v1(200.25,19.95) v1(200.25,19.32) v1(200.25,18.68) v1(200.84,22.1) v1(200.84,21.46) v1(200.84,20.83) v1(200.89,19.95) v1(200.89,19.32) v1(200.89,18.68) v1(201.47,22.1) v1(201.47,21.46) v1(201.47,20.83) v1(201.52,19.95) v1(201.52,19.32) v1(201.52,18.68) v1(202.11,22.1) v1(202.11,21.46) v1(202.11,20.83) v1(202.16,19.95) v1(202.16,19.32) v1(202.16,18.68) v1(202.74,22.1) v1(202.74,21.46) v1(202.74,20.83) v1(202.79,19.95) v1(202.79,19.32) v1(202.79,18.68) v1(203.38,22.1) v1(203.38,21.46) v1(203.38,20.83) v1(203.43,19.95) v1(203.43,19.32) v1(203.43,18.68)
GND: length 1161.3
  TOP w0.127: J26.3 187.6,19.71 ; J26.3 188.79,17.03 ; J26.3 187.6,14.35 ; J26.3 186.42,17.03 ; M5.1 232.59,227.33 ; M5.1 227.15,227.33 ; M5.1 229.87,230.05 ; M5.1 229.87,224.61 ; 26.67,224.61 M6.1 ; M6.1 29.39,227.33 ; M6.1 23.95,227.33 ; M6.1 26.67,230.05 ; M3.1 232.59,24.13 ; M3.1 227.15,24.13 ; M3.1 229.87,21.41 ; M3.1 229.87,26.85 ; J26.2 192.3,15.21 ; J26.2 189.62,14.03 ; J26.2 194.99,14.03 ; J26.2 192.3,12.85 ; 26.67,21.41 M4.1 ; M4.1 23.95,24.13 ; M4.1 26.67,26.85 ; M4.1 29.39,24.13
  GND0 w0.127: 187.6,14.35 J26.3 ; J26.3 187.6,19.71 ; J26.3 186.42,17.03 ; J26.3 188.79,17.03 ; 26.67,224.61 M6.1 ; M6.1 26.67,230.05 ; M6.1 29.39,227.33 ; M6.1 23.95,227.33 ; M4.1 26.67,26.85 ; M4.1 26.67,21.41 ; M4.1 23.95,24.13 ; M4.1 29.39,24.13 ; J26.2 192.3,15.21 ; J26.2 192.3,12.85 ; J26.2 194.99,14.03 ; J26.2 189.62,14.03 ; M5.1 232.59,227.33 ; M5.1 229.87,224.61 ; M5.1 227.15,227.33 ; M5.1 229.87,230.05 ; 229.87,21.41 M3.1 ; M3.1 229.87,26.85 ; M3.1 232.59,24.13 ; M3.1 227.15,24.13
  GND1 w0.127: J26.2 192.3,15.21 ; J26.2 192.3,12.85 ; J26.2 189.62,14.03 ; J26.2 194.99,14.03 ; 186.42,17.03 J26.3 ; J26.3 187.6,14.35 ; J26.3 188.79,17.03 ; J26.3 187.6,19.71 ; M3.1 232.59,24.13 ; M3.1 229.87,26.85 ; M3.1 227.15,24.13 ; M3.1 229.87,21.41 ; 26.67,21.41 M4.1 ; M4.1 26.67,26.85 ; M4.1 23.95,24.13 ; M4.1 29.39,24.13 ; M6.1 29.39,227.33 ; M6.1 26.67,224.61 ; M6.1 23.95,227.33 ; M6.1 26.67,230.05 ; 227.15,227.33 M5.1 ; M5.1 229.87,224.61 ; M5.1 229.87,230.05 ; M5.1 232.59,227.33
  MOSI w0.127: J26.2 194.99,14.03 ; J26.2 192.3,15.21 ; J26.2 189.62,14.03 ; J26.2 192.3,12.85 ; 187.6,14.35 J26.3 ; J26.3 186.42,17.03 ; J26.3 187.6,19.71 ; J26.3 188.79,17.03 ; 229.87,21.41 M3.1 ; M3.1 229.87,26.85 ; M3.1 232.59,24.13 ; M3.1 227.15,24.13 ; M5.1 232.59,227.33 ; M5.1 227.15,227.33 ; M5.1 229.87,230.05 ; M5.1 229.87,224.61 ; M6.1 29.39,227.33 ; M6.1 23.95,227.33 ; M6.1 26.67,230.05 ; M6.1 26.67,224.61 ; M4.1 26.67,26.85 ; M4.1 26.67,21.41 ; M4.1 23.95,24.13 ; M4.1 29.39,24.13
  GND2 w0.127: J26.2 192.3,15.21 ; J26.2 192.3,12.85 ; J26.2 194.99,14.03 ; J26.2 189.62,14.03 ; M5.1 232.59,227.33 ; M5.1 229.87,230.05 ; M5.1 227.15,227.33 ; M5.1 229.87,224.61 ; M3.1 229.87,26.85 ; M3.1 227.15,24.13 ; M3.1 229.87,21.41 ; M3.1 232.59,24.13 ; M4.1 26.67,26.85 ; M4.1 23.95,24.13 ; M4.1 29.39,24.13 ; M4.1 26.67,21.41 ; 26.67,224.61 M6.1 ; M6.1 23.95,227.33 ; M6.1 29.39,227.33 ; M6.1 26.67,230.05 ; 186.42,17.03 J26.3 ; J26.3 187.6,19.71 ; J26.3 187.6,14.35 ; J26.3 188.79,17.03
  SIG w0.127: 189.62,14.03 J26.2 ; J26.2 192.3,15.21 ; J26.2 194.99,14.03 ; J26.2 192.3,12.85 ; 23.95,24.13 M4.1 ; M4.1 26.67,26.85 ; M4.1 29.39,24.13 ; M4.1 26.67,21.41 ; M5.1 232.59,227.33 ; M5.1 229.87,224.61 ; M5.1 229.87,230.05 ; M5.1 227.15,227.33 ; 227.15,24.13 M3.1 ; M3.1 229.87,26.85 ; M3.1 232.59,24.13 ; M3.1 229.87,21.41 ; J26.3 188.79,17.03 ; J26.3 187.6,19.71 ; J26.3 187.6,14.35 ; J26.3 186.42,17.03 ; M6.1 26.67,230.05 ; M6.1 29.39,227.33 ; M6.1 26.67,224.61 ; M6.1 23.95,227.33
  MISO w0.127: 192.3,12.85 J26.2 ; J26.2 192.3,15.21 ; J26.2 189.62,14.03 ; J26.2 194.99,14.03 ; 229.87,21.41 M3.1 ; M3.1 232.59,24.13 ; M3.1 229.87,26.85 ; M3.1 227.15,24.13 ; M6.1 29.39,227.33 ; M6.1 26.67,230.05 ; M6.1 23.95,227.33 ; M6.1 26.67,224.61 ; 227.15,227.33 M5.1 ; M5.1 232.59,227.33 ; M5.1 229.87,224.61 ; M5.1 229.87,230.05 ; 26.67,21.41 M4.1 ; M4.1 23.95,24.13 ; M4.1 26.67,26.85 ; M4.1 29.39,24.13 ; 187.6,14.35 J26.3 ; J26.3 186.42,17.03 ; J26.3 188.79,17.03 ; J26.3 187.6,19.71
  GND4 w0.127: M4.1 29.39,24.13 ; M4.1 23.95,24.13 ; M4.1 26.67,26.85 ; M4.1 26.67,21.41 ; 229.87,21.41 M3.1 ; M3.1 232.59,24.13 ; M3.1 227.15,24.13 ; M3.1 229.87,26.85 ; 23.95,227.33 M6.1 ; M6.1 29.39,227.33 ; M6.1 26.67,224.61 ; M6.1 26.67,230.05 ; 227.15,227.33 M5.1 ; M5.1 229.87,224.61 ; M5.1 229.87,230.05 ; M5.1 232.59,227.33 ; J26.2 194.99,14.03 ; J26.2 192.3,15.21 ; J26.2 189.62,14.03 ; J26.2 192.3,12.85 ; 187.6,14.35 J26.3 ; J26.3 186.42,17.03 ; J26.3 187.6,19.71 ; J26.3 188.79,17.03
  BOTTOM w0.127: 55.7,125.73 128.27,125.73 ; 128.27,125.73 128.27,198.3 ; 128.27,125.73 128.27,53.16 ; 128.27,125.73 200.84,125.73 ; 93,26.7 C34.2 ; C34.2 93.88,27.43 ; C34.2 93,28.16 ; C34.2 92.12,27.43 ; 193.59,69.88 J2.2 ; J2.2 194.53,68.94 ; J2.2 194.53,70.82 ; J2.2 195.47,69.88 ; 221.26,57.67 U6.9 220.3,57.97 ; U4.12 174.32,42.81 ; U4.12 173.37,43.12 ; U4.12 173.37,42.51 ; C5.2 144.74,214.59 ; C5.2 144.01,215.47 ; C5.2 144.01,213.71 ; C16.2 70.84,56.22 ; C16.2 69.77,55.82 ; C16.2 70.65,57.35 ; C16.2 69.58,56.95 ; C3.2 186.61,195.4 ; C3.2 186.8,194.27 ; C3.2 185.72,193.87 ; C3.2 185.53,195 ; M3.1 229.87,26.85 ; M3.1 232.59,24.13 ; M3.1 227.15,24.13 ; M3.1 229.87,21.41 ; C24.2 213.27,157.01 ; C24.2 212.87,155.94 ; C24.2 211.74,156.13 ; C24.2 212.14,157.2 ; 179.92,36.96 U4.22 178.01,36.96 ; 197.02,67.72 197.39,68.35 ; 197.02,67.72 196.65,67.09 ; 197.02,67.72 196.26,68.16 ; 197.02,67.72 197.78,67.28 ; C15.2 70.55,52.8 ; C15.2 69.26,52.46 ; C15.2 68.92,53.75 ; C15.2 70.2,54.09 ; 20.15,124.8 U2.10 ; U2.10 20.15,125.41 ; U2.10 21.11,125.1 ; J26.2 194.99,14.03 ; J26.2 189.62,14.03 ; J26.2 192.3,15.21 ; J26.2 192.3,12.85 ; 229.87,224.61 M5.1 ; M5.1 227.15,227.33 ; M5.1 232.59,227.33 ; M5.1 229.87,230.05 ; 215.66,55.71 U6.13 ; U6.13 216.61,56.02 ; U6.13 214.7,56.02 ; 166.63,18.55 U5.13 165.67,18.25 ; 171.27,18.9 U5.11 172.23,19.2 ; 206.74,44.97 C42.2 ; C42.2 208.52,45.95 ; C42.2 204.96,45.95 ; C42.2 206.74,46.93 ; 218.53,111.21 C9.2 ; C9.2 219.47,110.27 ; C9.2 220.41,111.21 ; C33.2 98.6,28.16 ; C33.2 99.48,27.43 ; C33.2 97.72,27.43 ; C33.2 98.6,26.7 ; C2.2 142.76,218.35 ; C2.2 142.76,216.47 ; C2.2 143.7,217.41 ; C10.2 217.4,109.95 ; C10.2 216.52,109.22 ; C10.2 215.64,109.95 ; 86.5,31.13 R18.1 ; R18.1 87.23,30.25 ; R18.1 87.23,32.01 ; C18.2 159.42,40.33 ; C18.2 158.35,40.72 ; C18.2 159.61,41.46 ; C18.2 158.54,41.85 ; 71.48,59.47 J1.2 ; J1.2 72.42,60.41 ; J1.2 73.36,59.47 ; J1.2 72.42,58.53 ; 214.75,66.74 C35.2 ; C35.2 215.63,66 ; C35.2 215.63,67.47 ; 142.57,211.04 J19.2 ; J19.2 143.51,211.98 ; J19.2 143.51,210.1 ; J19.2 144.45,211.04 ; 111.76,37.25 C19.2 ; C19.2 112.49,38.13 ; C19.2 112.49,36.37 ; 19.26,114.99 C30.2 ; C30.2 21.02,114.99 ; C30.2 20.14,115.72 ; U1.12 77.74,16 ; U1.12 76.78,15.7 ; U1.12 v1(75.21,16) ; 41.31,92.97 C21.2 ; C21.2 42.6,92.63 ; C21.2 40.97,91.69 ; C21.2 42.25,91.34 ; R14.1 87.18,37.23 ; R14.1 87.18,35.47 ; R14.1 86.45,36.35 ; 23.95,24.13 M4.1 ; M4.1 26.67,26.85 ; M4.1 29.39,24.13 ; M4.1 26.67,21.41 ; C32.2 179.86,32.26 ; C32.2 178.98,32.99 ; C32.2 178.1,32.26 ; J26.3 188.79,17.03 ; J26.3 186.42,17.03 ; J26.3 187.6,19.71 ; J26.3 187.6,14.35 ; 71.18,15.7 U1.13 ; U1.13 70.23,16 ; U1.13 v1(72.76,16) ; 220.37,66.66 C36.2 ; C36.2 221.25,65.93 ; C36.2 222.13,66.66 ; J17.2 62.95,181.58 ; J17.2 61.07,181.58 ; J17.2 62.01,180.64 ; J17.2 62.01,182.52 ; C22.2 44.56,95.42 ; C22.2 43.03,94.54 ; C22.2 43.43,95.61 ; C22.2 44.16,94.35 ; Q1.3 81.81,39.4 ; Q1.3 81.81,37.82 ; Q1.3 81.13,38.61 ; C17.2 162.42,39.38 ; C17.2 162.07,38.1 ; C17.2 160.79,38.44 ; C17.2 161.13,39.73 ; 24.87,114.91 C29.2 ; C29.2 26.64,114.91 ; C29.2 25.76,115.64 ; 81.13,33.44 Q3.3 ; Q3.3 81.81,32.65 ; Q3.3 81.81,34.23 ; 171.27,18.25 U5.12 ; U5.12 171.27,18.86 ; U5.12 172.23,18.55 ; 210.53,40.43 C39.2 ; C39.2 211.51,38.65 ; C39.2 211.51,42.21 ; C39.2 212.49,40.43 ; C12.2 40.38,141.47 ; C12.2 39.5,142.2 ; C12.2 38.62,141.47 ; 97.87,207.23 J6.2 ; J6.2 99.76,207.23 ; J6.2 98.81,208.17 ; J6.2 98.81,206.29 ; 209.77,154.24 J3.2 ; J3.2 209.77,156.13 ; J3.2 208.83,155.19 ; J3.2 210.71,155.19 ; J10.2 46.77,97.22 ; J10.2 46.77,95.33 ; J10.2 47.71,96.27 ; J10.2 45.83,96.27 ; C11.2 37.73,140.22 ; C11.2 35.85,140.22 ; C11.2 36.79,141.16 ; 212.64,110.49 J9.2 ; J9.2 213.58,109.55 ; J9.2 213.58,111.43 ; J9.2 214.52,110.49 ; 98.6,16.36 U3.12 ; U3.12 98.6,16.97 ; U3.12 99.56,16.66 ; L2.2 218.24,41.1 ; L2.2 218.24,39.09 ; L2.2 216.47,40.09 ; L2.2 220,40.09 ; 199.81,66.58 C13.2 ; C13.2 200.75,68.21 ; C13.2 199.46,67.87 ; C13.2 201.09,66.92 ; C40.2 218.24,38.14 ; C40.2 219.12,37.41 ; C40.2 217.36,37.41 ; 75.9,26.64 C25.2 ; C25.2 77.67,26.64 ; C25.2 76.78,25.91 ; 20.15,125.45 U2.11 ; U2.11 21.11,125.75 ; U2.11 20.15,126.06 ; 171.26,28.53 C27.2 ; C27.2 170.38,29.26 ; C27.2 172.14,29.26 ; C26.2 166.57,29.26 ; C26.2 164.8,29.26 ; C26.2 165.68,28.53 ; C8.2 57.15,183.57 ; C8.2 55.86,183.23 ; C8.2 55.52,184.51 ; C8.2 56.81,184.86 ; 173.37,42.47 U4.11 174.32,42.16 ; J7.2 184.12,192.93 ; J7.2 184.12,191.05 ; J7.2 185.06,191.99 ; J7.2 183.18,191.99 ; 157.73,43.29 J8.2 ; J8.2 157.73,45.17 ; J8.2 156.78,44.23 ; J8.2 158.67,44.23 ; 93.96,16.66 U3.13 93,16.36 ; 70.3,26.73 C28.2 ; C28.2 72.06,26.73 ; C28.2 71.18,26 ; J5.2 43.9,140.97 ; J5.2 42.96,140.03 ; J5.2 42.02,140.97 ; J5.2 42.96,141.91 ; C20.2 113.75,35.25 ; C20.2 112.81,34.3 ; C20.2 113.75,33.36 ; 166.63,24.4 U5.22 165.67,24.1 ; U6.10 221.26,57.62 ; U6.10 221.26,57.02 ; U6.10 220.3,57.32 ; 99.56,17.31 U3.11 98.6,17.01 ; C31.2 174.26,32.3 ; C31.2 172.5,32.3 ; C31.2 173.38,33.03 ; 214.01,160.32 C23.2 ; C23.2 214.95,158.69 ; C23.2 215.29,159.98 ; C23.2 213.66,159.04 ; 221.26,56.37 U6.11 ; U6.11 221.26,56.97 ; U6.11 220.3,56.67 ; C6.2 98.04,209.33 ; C6.2 98.23,210.46 ; C6.2 97.16,210.86 ; C6.2 96.96,209.73 ; C1.2 95.37,211.21 ; C1.2 94.43,212.84 ; C1.2 95.71,212.5 ; C1.2 94.08,211.56 ; M6.1 29.39,227.33 ; M6.1 23.95,227.33 ; M6.1 26.67,224.61 ; M6.1 26.67,230.05 ; 211.65,21.55 U7.6 ; U7.6 216.27,27.06 ; U7.6 211.65,32.58 ; 20.15,124.76 U2.9 21.11,124.45 ; U4.13 179.92,42.81 ; U4.13 178.97,43.12 ; U4.13 178.01,42.81 ; 208.65,17.43 L1.1 ; L1.1 208.65,20.97 ; L1.1 207.64,19.2 ; L1.1 209.65,19.2 ; C44.2 204.46,50.28 ; C44.2 203.73,49.4 ; C44.2 203.73,51.16 ; U1.11 78.36,16.65 ; U1.22 v1(72.76,21.85) ; U2.12 20.15,126.71 ; U2.12 21.11,126.4 ; U2.12 20.15,126.1 ; U2.13 25.76,126.71 ; U2.13 26.71,126.4 ; U2.13 24.8,126.4 ; U6.12 221.26,56.32 ; U6.12 220.3,56.02 ; U6.12 221.26,55.71 ; 186.78,23.48 C38.2 ; C38.2 186.78,25.44 ; C38.2 185,24.46 ; C38.2 188.56,24.46 ; 112.09,40.42 J4.2 ; J4.2 113.97,40.42 ; J4.2 113.03,39.48 ; J4.2 113.03,41.36 ; 186.62,198.15 187.43,197.67 ; 186.62,198.15 187.09,198.96 ; 186.62,198.15 185.8,198.62 ; 186.62,198.15 186.15,197.33 ; C7.2 60.37,183.18 ; C7.2 58.84,184.07 ; C7.2 59.97,184.26 ; C7.2 59.24,182.99 ; 215.09,37.42 C41.2 ; C41.2 216.86,37.42 ; C41.2 215.98,38.16 ; C37.2 186.77,29.47 ; C37.2 186.04,28.59 ; C37.2 186.77,27.71
  BOTTOM w0.203: U4.11 v1(172.25,42.16) ; U3.11 v1(97.5,17.31) ; U6.9 v1(222.66,57.97) ; R18.1 v1(88.58,31.13) ; C27.2 v1(171.26,30.25) ; U6.22 v1(217.06,61.87) ; U6.10 v1(222.66,57.32) ; C36.2 v1(221.25,68.07) ; C30.2 v1(20.14,113.72) ; C29.2 v1(25.76,113.64) ; C26.2 v1(165.68,30.25) ; U4.12 v1(171.66,42.81) ; U5.11 v1(170.15,19.2) ; U2.12 v1(18.88,126.4) ; U6.12 v1(222.66,56.02) ; C28.2 v1(71.18,28.08) ; C25.2 v1(76.78,27.86) ; U3.12 v1(97.5,16.66) ; U5.12 v1(170.15,18.55) ; U6.11 v1(222.66,56.67) ; U5.13 v1(164.55,18.55) ; U2.22 v1(24.71,120.55) ; Q1.3 v1(83.16,38.61) ; R14.1 v1(88.53,36.35) ; C31.2 v1(173.38,30.26) ; U2.11 v1(18.88,125.75) ; Q3.3 v1(83.16,33.44) ; U1.11 U1.12 ; C32.2 v1(178.98,30.23) ; C35.2 v1(217.17,66.74) ; U2.9 v1(18.88,124.45) ; U3.13 v1(91.9,16.66) ; U5.22 v1(164.55,24.4) ; U3.22 v1(94.11,22.51) ; U2.10 v1(18.88,125.1)
  BOTTOM w0.381: C2.2 v1(141.63,217.41) ; C12.2 v1(39.5,140.33) ; C22.2 v1(44.36,94) ; C6.2 v1(96.61,209.52) ; 186.62,198.15 v1(185.64,198.71) ; C20.2 v1(114.89,34.3) ; C18.2 v1(159.96,41.66) ; C16.2 v1(71.19,56.02) ; C9.2 v1(219.47,112.35) ; C23.2 v1(213.91,160.49) ; C3.2 v1(185.18,195.2) ; C24.2 v1(211.94,157.55) ; C5.2 v1(142.87,214.59) ; C10.2 v1(216.52,111.09) ; C8.2 v1(55.77,183.06) ; C15.2 v1(70.71,52.71) ; C1.2 v1(93.92,211.46) ; C21.2 v1(42.35,91.17) ; C17.2 v1(162.59,39.48) ; C19.2 v1(113.63,37.25) ; 197.02,67.72 v1(197.59,68.7) ; C11.2 v1(36.79,139.09) ; C13.2 v1(200.85,68.38) ; C7.2 v1(59.04,182.64)
  BOTTOM w0.635: U7.3 206.73,27.09 206.75,27.06 U7.6
  vias: v1(16.51,232.41) v1(16.51,229.87) v1(16.51,227.33) v1(16.51,224.79) v1(16.51,222.25) v1(16.51,219.71) v1(16.51,217.17) v1(16.51,214.63) v1(16.51,212.09) v1(16.51,209.55) v1(16.51,207.01) v1(16.51,204.47) v1(16.51,201.93) v1(16.51,199.39) v1(16.51,196.85) v1(16.51,194.31) v1(16.51,191.77) v1(16.51,189.23) v1(16.51,186.69) v1(16.51,184.15) v1(16.51,181.61) v1(16.51,179.07) v1(16.51,176.53) v1(16.51,173.99) v1(16.51,171.45) v1(16.51,168.91) v1(16.51,166.37) v1(16.51,163.83) v1(16.51,161.29) v1(16.51,158.75) v1(16.51,156.21) v1(16.51,153.67) v1(16.51,151.13) v1(16.51,148.59) v1(16.51,146.05) v1(16.51,143.51) v1(16.51,140.97) v1(16.51,138.43) v1(16.51,135.89) v1(16.51,133.35) v1(16.51,130.81) v1(16.51,128.27) v1(16.51,125.73) v1(16.51,123.19) v1(16.51,120.65) v1(16.51,118.11) v1(16.51,115.57) v1(16.51,113.03) v1(16.51,110.49) v1(16.51,107.95) v1(16.51,105.41) v1(16.51,102.87) v1(16.51,100.33) v1(16.51,97.79) v1(16.51,95.25) v1(16.51,92.71) v1(16.51,90.17) v1(16.51,87.63) v1(16.51,85.09) v1(16.51,82.55) v1(16.51,80.01) v1(16.51,77.47) v1(16.51,74.93) v1(16.51,72.39) v1(16.51,69.85) v1(16.51,67.31) v1(16.51,64.77) v1(16.51,62.23) v1(16.51,59.69) v1(16.51,57.15) v1(16.51,54.61) v1(16.51,52.07) v1(16.51,49.53) v1(16.51,46.99) v1(16.51,44.45) v1(16.51,41.91) v1(16.51,39.37) v1(16.51,36.83) v1(16.51,34.29) v1(16.51,31.75) v1(16.51,29.21) v1(16.51,26.67) v1(16.51,24.13) v1(16.51,21.59) v1(16.51,19.05) v1(21.59,237.49) v1(24.13,237.49) v1(26.67,237.49) v1(29.21,237.49) v1(31.75,237.49) v1(34.29,237.49) v1(36.83,237.49) v1(39.37,237.49) v1(41.91,237.49) v1(44.45,237.49) v1(46.99,237.49) v1(49.53,237.49) v1(52.07,237.49) v1(54.61,237.49) v1(57.15,237.49) v1(59.69,237.49) v1(62.23,237.49) v1(64.77,237.49) v1(67.31,237.49) v1(69.85,237.49) v1(72.39,237.49) v1(74.93,237.49) v1(77.47,237.49) v1(80.01,237.49) v1(82.55,237.49) v1(85.09,237.49) v1(87.63,237.49) v1(90.17,237.49) v1(92.71,237.49) v1(95.25,237.49) v1(97.79,237.49) v1(100.33,237.49) v1(102.87,237.49) v1(105.41,237.49) v1(107.95,237.49) v1(110.49,237.49) v1(113.03,237.49) v1(115.57,237.49) v1(118.11,237.49) v1(120.65,237.49) v1(123.19,237.49) v1(125.73,237.49) v1(128.27,237.49) v1(130.81,237.49) v1(133.35,237.49) v1(135.89,237.49) v1(138.43,237.49) v1(140.97,237.49) v1(143.51,237.49) v1(146.05,237.49) v1(148.59,237.49) v1(151.13,237.49) v1(153.67,237.49) v1(156.21,237.49) v1(158.75,237.49) v1(161.29,237.49) v1(163.83,237.49) v1(166.37,237.49) v1(168.91,237.49) v1(171.45,237.49) v1(173.99,237.49) v1(176.53,237.49) v1(179.07,237.49) v1(181.61,237.49) v1(184.15,237.49) v1(186.69,237.49) v1(189.23,237.49) v1(191.77,237.49) v1(194.31,237.49) v1(196.65,45.99) v1(196.85,237.49) v1(199.39,237.49) v1(201.93,237.49) v1(204.47,237.49) v1(206.22,42.42) v1(206.22,41.78) v1(206.22,41.15) v1(206.22,40.51) v1(206.22,39.88) v1(206.22,39.24) v1(206.86,42.42) v1(206.86,41.78) v1(206.86,41.15) v1(206.86,40.51) v1(206.86,39.88) v1(206.86,39.24) v1(207.01,237.49) v1(207.49,42.42) v1(207.49,41.78) v1(207.49,41.15) v1(207.49,40.51) v1(207.49,39.88) v1(207.49,39.24) v1(209.12,47.19) v1(209.12,46.56) v1(209.12,45.92) v1(209.12,45.29) v1(209.12,44.65) v1(209.12,44.02) v1(209.55,237.49) v1(209.75,47.19) v1(209.75,46.56) v1(209.75,45.92) v1(209.75,45.29) v1(209.75,44.65) v1(209.75,44.02) v1(210.39,47.19) v1(210.39,46.56) v1(210.39,45.92) v1(210.39,45.29) v1(210.39,44.65) v1(210.39,44.02) v1(211.38,47.17) v1(211.38,46.53) v1(211.38,45.9) v1(211.38,45.26) v1(211.38,44.63) v1(211.38,43.99) v1(212.01,47.17) v1(212.01,46.53) v1(212.01,45.9) v1(212.01,45.26) v1(212.01,44.63) v1(212.01,43.99) v1(212.09,237.49) v1(212.29,30.94) v1(212.29,30.3) v1(212.29,29.67) v1(212.29,28.8) v1(212.29,28.17) v1(212.29,27.53) v1(212.27,26.54) v1(212.27,25.91) v1(212.27,25.27) v1(212.26,24.32) v1(212.26,23.69) v1(212.26,23.05) v1(212.65,47.17) v1(212.65,46.53) v1(212.65,45.9) v1(212.65,45.26) v1(212.65,44.63) v1(212.65,43.99) v1(212.9,26.54) v1(212.9,25.91) v1(212.9,25.27) v1(212.89,24.32) v1(212.89,23.69) v1(212.89,23.05) v1(212.93,30.94) v1(212.93,30.3) v1(212.93,29.67) v1(212.93,28.8) v1(212.93,28.17) v1(212.93,27.53) v1(213.6,47.16) v1(213.6,46.52) v1(213.6,45.89) v1(213.6,45.25) v1(213.6,44.62) v1(213.6,43.98) v1(213.56,30.94) v1(213.56,30.3) v1(213.56,29.67) v1(213.56,28.8) v1(213.56,28.17) v1(213.56,27.53) v1(213.54,26.54) v1(213.54,25.91) v1(213.54,25.27) v1(213.53,24.32) v1(213.53,23.69) v1(213.53,23.05) v1(214.2,30.94) v1(214.2,30.3) v1(214.2,29.67) v1(214.2,28.8) v1(214.2,28.17) v1(214.2,27.53) v1(214.17,26.54) v1(214.17,25.91) v1(214.17,25.27) v1(214.16,24.32) v1(214.16,23.69) v1(214.16,23.05) v1(214.24,47.16) v1(214.24,46.52) v1(214.24,45.89) v1(214.24,45.25) v1(214.24,44.62) v1(214.24,43.98) v1(214.63,237.49) v1(214.81,26.54) v1(214.81,25.91) v1(214.81,25.27) v1(214.8,24.32) v1(214.8,23.69) v1(214.8,23.05) v1(214.87,47.16) v1(214.87,46.52) v1(214.87,45.89) v1(214.87,45.25) v1(214.87,44.62) v1(214.87,43.98) v1(214.83,30.94) v1(214.83,30.3) v1(214.83,29.67) v1(214.83,28.8) v1(214.83,28.17) v1(214.83,27.53) v1(215.47,30.94) v1(215.47,30.3) v1(215.47,29.67) v1(215.47,28.8) v1(215.47,28.17) v1(215.47,27.53) v1(215.44,26.54) v1(215.44,25.91) v1(215.44,25.27) v1(215.43,24.32) v1(215.43,23.69) v1(215.43,23.05) v1(217.17,237.49) v1(219.71,237.49) v1(222.25,237.49) v1(224.79,237.49) v1(227.33,237.49) v1(229.87,237.49) v1(232.41,237.49) v1(234.95,237.49) v1(240.03,232.41) v1(240.03,229.87) v1(240.03,227.33) v1(240.03,224.79) v1(240.03,222.25) v1(240.03,219.71) v1(240.03,217.17) v1(240.03,214.63) v1(240.03,212.09) v1(240.03,209.55) v1(240.03,207.01) v1(240.03,204.47) v1(240.03,201.93) v1(240.03,199.39) v1(240.03,196.85) v1(240.03,194.31) v1(240.03,191.77) v1(240.03,189.23) v1(240.03,186.69) v1(240.03,184.15) v1(240.03,181.61) v1(240.03,179.07) v1(240.03,176.53) v1(240.03,173.99) v1(240.03,171.45) v1(240.03,168.91) v1(240.03,166.37) v1(240.03,163.83) v1(240.03,161.29) v1(240.03,158.75) v1(240.03,156.21) v1(240.03,153.67) v1(240.03,151.13) v1(240.03,148.59) v1(240.03,146.05) v1(240.03,143.51) v1(240.03,140.97) v1(240.03,138.43) v1(240.03,135.89) v1(240.03,133.35) v1(240.03,130.81) v1(240.03,128.27) v1(240.03,125.73) v1(240.03,123.19) v1(240.03,120.65) v1(240.03,118.11) v1(240.03,115.57) v1(240.03,113.03) v1(240.03,110.49) v1(240.03,107.95) v1(240.03,105.41) v1(240.03,102.87) v1(240.03,100.33) v1(240.03,97.79) v1(240.03,95.25) v1(240.03,92.71) v1(240.03,90.17) v1(240.03,87.63) v1(240.03,85.09) v1(240.03,82.55) v1(240.03,80.01) v1(240.03,77.47) v1(240.03,74.93) v1(240.03,72.39) v1(240.03,69.85) v1(240.03,67.31) v1(240.03,64.77) v1(240.03,62.23) v1(240.03,59.69) v1(240.03,57.15) v1(240.03,54.61) v1(240.03,52.07) v1(240.03,49.53) v1(240.03,46.99) v1(240.03,44.45) v1(240.03,41.91) v1(240.03,39.37) v1(240.03,36.83) v1(240.03,34.29) v1(240.03,31.75) v1(240.03,29.21) v1(240.03,26.67) v1(240.03,24.13) v1(240.03,21.59) v1(240.03,19.05)
GND_SIGNAL: length 145
  GND3 w0.635: v1(132.47,28.11) 132.47,25.83 ; 132.47,25.83 161.58,25.83 163.28,27.53 190.35,27.53 194.78,31.97 210.16,31.97 217.67,39.47 217.67,43.92 v1(218.24,44.49) ; 132.47,25.83 v1(132.47,18.15) v1(129.93,18.15) 115.96,18.15 v1(113.29,20.82)
  BOTTOM w0.127: J25.14 v1(132.47,28.11) ; J25.27 v1(132.47,18.15) ; J25.29 v1(129.93,18.15) ; J25.40 v1(113.29,20.82)
  BOTTOM w0.635: J25.27 J25.14 ; v1(218.24,44.49) L2.1 ; J25.40 J25.39
CS0: length 86.5
  TOP w0.381: J8.7 169.93,49.38 169.93,41.66 167.64,39.37 167.64,35.31 166.12,33.78 158.5,33.78 157.48,32.77 v1(157.48,21.34)
  MOSI w0.127: 124.79,40.42 J4.7 ; J4.7 126.67,40.42 ; J4.7 125.73,39.48 ; J4.7 125.73,41.36 ; J5.7 43.9,128.27 ; J5.7 42.96,127.33 ; J5.7 42.96,129.21 ; J5.7 42.02,128.27 ; J10.7 53.12,86.22 ; J10.7 53.12,84.33 ; J10.7 54.06,85.28 ; J10.7 52.18,85.28 ; 200.88,79.93 J2.7 ; J2.7 200.88,81.82 ; J2.7 201.82,80.88 ; J2.7 199.94,80.88 ; J1.7 84.36,53.12 ; J1.7 82.47,53.12 ; J1.7 83.42,54.06 ; J1.7 83.42,52.18 ; J3.7 203.42,167.13 ; J3.7 203.42,165.24 ; J3.7 202.48,166.18 ; J3.7 204.36,166.18 ; J9.7 213.58,124.13 ; J9.7 212.64,123.19 ; J9.7 213.58,122.25 ; J9.7 214.52,123.19 ; 130.81,210.1 J19.7 ; J19.7 129.87,211.04 ; J19.7 130.81,211.98 ; J19.7 131.75,211.04 ; J6.7 87.82,201.82 ; J6.7 87.82,199.94 ; J6.7 88.76,200.88 ; J6.7 86.87,200.88 ; 167.78,50.58 J8.7 ; J8.7 168.72,49.64 ; J8.7 169.67,50.58 ; J8.7 168.72,51.52 ; 173.12,197.4 J7.7 ; J7.7 173.12,199.28 ; J7.7 172.18,198.34 ; J7.7 174.07,198.34 ; J17.7 56.6,170.58 ; J17.7 55.66,169.64 ; J17.7 54.72,170.58 ; J17.7 55.66,171.53
  BOTTOM w0.254: v1(157.48,21.34) 157.37,21.23 RN5.4
CS1: length 89.5
  TOP w0.254: v1(153.87,20.58) 153.87,32.56 149.61,36.83 129.03,36.83 128.27,37.59 J4.8
  GND3 w0.127: J17.8 55.33,168.38 ; J17.8 54.39,167.44 ; J17.8 53.45,168.38 ; J17.8 54.39,169.33 ; J6.8 86.56,199.61 ; J6.8 84.67,199.61 ; J6.8 85.62,198.67 ; J6.8 85.62,200.55 ; J7.8 170.92,200.55 ; J7.8 169.98,199.61 ; J7.8 171.87,199.61 ; J7.8 170.92,198.67 ; J2.8 202.15,84.02 ; J2.8 203.09,83.08 ; J2.8 202.15,82.13 ; J2.8 201.21,83.08 ; J5.8 42.96,126.67 ; J5.8 42.96,124.79 ; J5.8 43.9,125.73 ; J5.8 42.02,125.73 ; J9.8 213.58,126.67 ; J9.8 214.52,125.73 ; J9.8 213.58,124.79 ; J9.8 212.64,125.73 ; 85.62,50.91 J1.8 ; J1.8 84.67,51.85 ; J1.8 85.62,52.79 ; J1.8 86.56,51.85 ; 54.39,82.13 J10.8 ; J10.8 54.39,84.02 ; J10.8 53.45,83.08 ; J10.8 55.33,83.08 ; 170.92,50.91 J8.8 ; J8.8 170.92,52.79 ; J8.8 171.87,51.85 ; J8.8 169.98,51.85 ; J3.8 202.15,169.33 ; J3.8 203.09,168.38 ; J3.8 201.21,168.38 ; J3.8 202.15,167.44 ; 128.27,39.48 J4.8 ; J4.8 127.33,40.42 ; J4.8 128.27,41.36 ; J4.8 129.21,40.42 ; J19.8 129.21,211.04 ; J19.8 128.27,211.98 ; J19.8 128.27,210.1 ; J19.8 127.33,211.04
  BOTTOM w0.203: RN5.3 v1(153.87,20.58)
CS2: length 90
  TOP w0.254: J4.9 130.81,38.61 131.57,37.85 152.4,37.85 152.4,37.84 153.67,37.84 154.82,36.69 154.82,36.18 154.82,36.18 154.82,35.42 154.83,35.42 154.83,20.32 v1(154.43,19.93)
  GND4 w0.127: 200.88,169.64 J3.9 ; J3.9 201.82,170.58 ; J3.9 200.88,171.53 ; J3.9 199.94,170.58 ; J8.9 173.12,54.06 ; J8.9 172.18,53.12 ; J8.9 173.12,52.18 ; J8.9 174.07,53.12 ; 212.64,128.27 J9.9 ; J9.9 213.58,129.21 ; J9.9 213.58,127.33 ; J9.9 214.52,128.27 ; 130.81,39.48 J4.9 ; J4.9 129.87,40.42 ; J4.9 130.81,41.36 ; J4.9 131.75,40.42 ; J19.9 125.73,211.98 ; J19.9 126.67,211.04 ; J19.9 124.79,211.04 ; J19.9 125.73,210.1 ; J17.9 54.06,166.18 ; J17.9 53.12,165.24 ; J17.9 53.12,167.13 ; J17.9 52.18,166.18 ; 167.78,200.88 J7.9 ; J7.9 169.67,200.88 ; J7.9 168.72,201.82 ; J7.9 168.72,199.94 ; 42.02,123.19 J5.9 ; J5.9 43.9,123.19 ; J5.9 42.96,122.25 ; J5.9 42.96,124.13 ; J1.9 88.76,50.58 ; J1.9 86.87,50.58 ; J1.9 87.82,51.52 ; J1.9 87.82,49.64 ; J6.9 83.42,199.28 ; J6.9 84.36,198.34 ; J6.9 83.42,197.4 ; J6.9 82.47,198.34 ; J10.9 56.6,80.88 ; J10.9 55.66,81.82 ; J10.9 54.72,80.88 ; J10.9 55.66,79.93 ; J2.9 204.36,85.28 ; J2.9 202.48,85.28 ; J2.9 203.42,84.33 ; J2.9 203.42,86.22
  BOTTOM w0.203: RN5.2 v1(154.43,19.93)
CS3: length 90.3
  TOP w0.254: v1(153.87,19.28) 155.17,19.28 155.7,19.81 155.7,37.59 154.43,38.86 134.91,38.86 J4.10
  SIG w0.127: 50.91,163.98 J17.10 ; J17.10 51.85,164.93 ; J17.10 52.79,163.98 ; J17.10 51.85,163.04 ; J1.10 90.02,50.25 ; J1.10 90.96,49.31 ; J1.10 89.07,49.31 ; J1.10 90.02,48.37 ; 56.93,77.73 J10.10 ; J10.10 57.87,78.68 ; J10.10 55.99,78.68 ; J10.10 56.93,79.62 ; 175.32,53.45 J8.10 ; J8.10 174.38,54.39 ; J8.10 175.32,55.33 ; J8.10 176.27,54.39 ; 80.27,197.07 J6.10 ; J6.10 82.16,197.07 ; J6.10 81.22,196.13 ; J6.10 81.22,198.01 ; 213.58,129.87 J9.10 ; J9.10 212.64,130.81 ; J9.10 213.58,131.75 ; J9.10 214.52,130.81 ; 203.75,87.48 J2.10 ; J2.10 204.69,88.42 ; J2.10 205.63,87.48 ; J2.10 204.69,86.53 ; J19.10 123.19,211.98 ; J19.10 122.25,211.04 ; J19.10 124.13,211.04 ; J19.10 123.19,210.1 ; J5.10 42.96,121.59 ; J5.10 43.9,120.65 ; J5.10 42.96,119.71 ; J5.10 42.02,120.65 ; J4.10 133.35,41.36 ; J4.10 132.41,40.42 ; J4.10 134.29,40.42 ; J4.10 133.35,39.48 ; J7.10 167.47,202.15 ; J7.10 165.58,202.15 ; J7.10 166.52,203.09 ; J7.10 166.52,201.21 ; 199.61,171.84 J3.10 ; J3.10 199.61,173.73 ; J3.10 200.55,172.78 ; J3.10 198.67,172.78
  BOTTOM w0.203: RN5.1 v1(153.87,19.28)
CS4: length 105.3
  GND2 w0.127: 213.58,132.41 J9.11 ; J9.11 214.52,133.35 ; J9.11 213.58,134.29 ; J9.11 212.64,133.35 ; 205.02,89.67 205.96,89.67 ; 205.96,89.67 205.96,88.73 ; 205.96,89.67 206.9,89.67 ; 205.96,89.67 205.96,90.62 ; J3.11 198.34,175.93 ; J3.11 198.34,174.04 ; J3.11 197.4,174.98 ; J3.11 199.28,174.98 ; 164.33,202.48 164.33,203.42 ; 164.33,203.42 164.33,204.36 ; 164.33,203.42 165.27,203.42 ; 164.33,203.42 163.38,203.42 ; J5.11 42.96,119.05 ; J5.11 42.02,118.11 ; J5.11 43.9,118.11 ; J5.11 42.96,117.17 ; 50.58,161.79 51.52,161.79 ; 50.58,161.79 50.58,162.73 ; 50.58,161.79 49.64,161.79 ; 50.58,161.79 50.58,160.84 ; 78.07,195.8 J6.11 ; J6.11 79.02,194.86 ; J6.11 79.02,196.74 ; J6.11 79.96,195.8 ; J8.11 177.52,56.6 ; J8.11 177.52,54.72 ; J8.11 176.58,55.66 ; J8.11 178.47,55.66 ; 135.89,39.48 J4.11 ; J4.11 135.89,41.36 ; J4.11 134.95,40.42 ; J4.11 136.83,40.42 ; J19.11 120.65,211.98 ; J19.11 119.71,211.04 ; J19.11 120.65,210.1 ; J19.11 121.59,211.04 ; 91.27,48.04 92.21,48.04 ; 92.21,48.04 92.21,47.1 ; 92.21,48.04 92.21,48.98 ; 92.21,48.04 93.16,48.04 ; J10.11 59.14,76.48 ; J10.11 57.26,76.48 ; J10.11 58.2,75.53 ; J10.11 58.2,77.42
  BOTTOM w0.254: RN1.2 v1(60.03,17.28)
  BOTTOM w0.381: 92.21,48.04 89.64,45.47 66.55,45.47 65.02,43.94 65.02,18.03 64.36,17.37 64.04,17.37 63.93,17.35 63.83,17.31 63.79,17.28 RN1.2
CS5: length 107.8
  TOP w0.127: 94.41,46.77 94.41,47.71 ; 94.41,46.77 95.36,46.77 ; 94.41,46.77 93.47,46.77 ; 94.41,46.77 94.41,45.83 ; J5.12 43.9,115.57 ; J5.12 42.96,116.51 ; J5.12 42.96,114.63 ; J5.12 42.02,115.57 ; 49.31,159.59 49.31,160.53 ; 49.31,159.59 49.31,158.64 ; 49.31,159.59 50.25,159.59 ; 49.31,159.59 48.37,159.59 ; 162.13,203.75 162.13,204.69 ; 162.13,204.69 163.07,204.69 ; 162.13,204.69 162.13,205.63 ; 162.13,204.69 161.18,204.69 ; 59.47,74.28 60.41,74.28 ; 59.47,74.28 59.47,73.33 ; 59.47,74.28 58.53,74.28 ; 59.47,74.28 59.47,75.22 ; J19.12 118.11,211.98 ; J19.12 119.05,211.04 ; J19.12 117.17,211.04 ; J19.12 118.11,210.1 ; 196.13,177.18 197.07,177.18 ; 197.07,177.18 197.07,176.24 ; 197.07,177.18 198.01,177.18 ; 197.07,177.18 197.07,178.13 ; 179.72,55.99 179.72,56.93 ; 179.72,56.93 180.67,56.93 ; 179.72,56.93 179.72,57.87 ; 179.72,56.93 178.78,56.93 ; 75.87,194.53 76.82,194.53 ; 76.82,194.53 76.82,193.59 ; 76.82,194.53 77.76,194.53 ; 76.82,194.53 76.82,195.47 ; 206.29,91.87 207.23,91.87 ; 207.23,91.87 207.23,90.93 ; 207.23,91.87 207.23,92.82 ; 207.23,91.87 208.17,91.87 ; J9.12 214.52,135.89 ; J9.12 212.64,135.89 ; J9.12 213.58,134.95 ; J9.12 213.58,136.83 ; 138.43,39.48 J4.12 ; J4.12 139.37,40.42 ; J4.12 137.49,40.42 ; J4.12 138.43,41.36
  BOTTOM w0.254: RN1.1 v1(59.08,16.63)
  BOTTOM w0.381: RN1.1 65.66,16.63 66.29,17.27 66.29,42.42 67.56,43.69 91.33,43.69 94.41,46.77
CS6: length 71.4
  TOP w0.203: v1(191.01,41.52) 184.18,41.52 182.75,42.94 182.75,57.37 181.92,58.2
  GND0 w0.127: 115.57,210.1 J19.13 ; J19.13 116.51,211.04 ; J19.13 115.57,211.98 ; J19.13 114.63,211.04 ; J9.13 213.58,139.37 ; J9.13 213.58,137.49 ; J9.13 214.52,138.43 ; J9.13 212.64,138.43 ; 96.61,44.56 J1.13 ; J1.13 95.67,45.5 ; J1.13 97.56,45.5 ; J1.13 96.61,46.44 ; 48.04,156.44 J17.13 ; J17.13 48.98,157.39 ; J17.13 47.1,157.39 ; J17.13 48.04,158.33 ; 181.92,58.2 181.92,59.14 ; 181.92,58.2 180.98,58.2 ; 181.92,58.2 182.86,58.2 ; 181.92,58.2 181.92,57.26 ; J4.13 141.91,40.42 ; J4.13 140.97,39.48 ; J4.13 140.97,41.36 ; J4.13 140.03,40.42 ; J5.13 42.96,113.97 ; J5.13 43.9,113.03 ; J5.13 42.02,113.03 ; J5.13 42.96,112.09 ; 195.8,179.38 196.74,179.38 ; 195.8,179.38 195.8,178.44 ; 195.8,179.38 194.86,179.38 ; 195.8,179.38 195.8,180.32 ; 74.62,192.32 74.62,193.26 ; 74.62,193.26 73.68,193.26 ; 74.62,193.26 74.62,194.2 ; 74.62,193.26 75.56,193.26 ; 60.74,71.14 60.74,72.08 ; 60.74,72.08 61.68,72.08 ; 60.74,72.08 60.74,73.02 ; 60.74,72.08 59.8,72.08 ; 208.5,93.13 J2.13 ; J2.13 209.44,94.07 ; J2.13 207.56,94.07 ; J2.13 208.5,95.02 ; 159.93,205.02 J7.13 ; J7.13 160.87,205.96 ; J7.13 158.98,205.96 ; J7.13 159.93,206.9
  BOTTOM w0.254: RN4.2 v1(191.01,41.52)
